# EAGLE board mote (EAGLE 8.4.0)
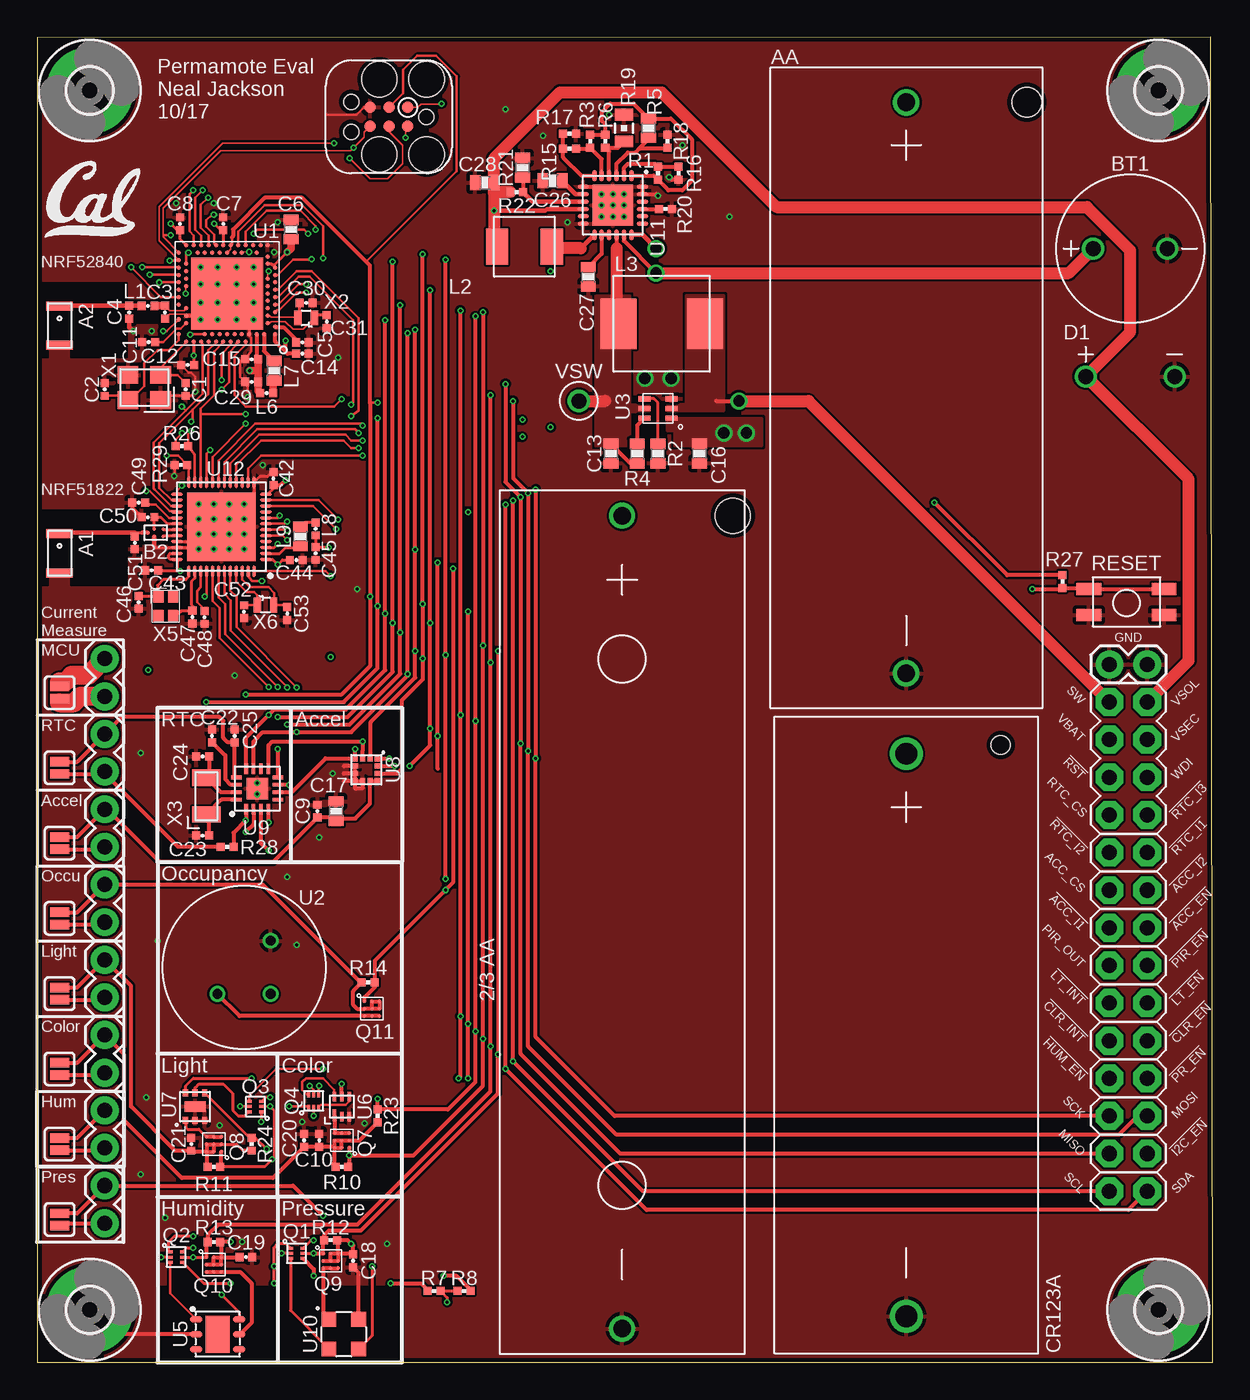
[diagram p0: board, top side]
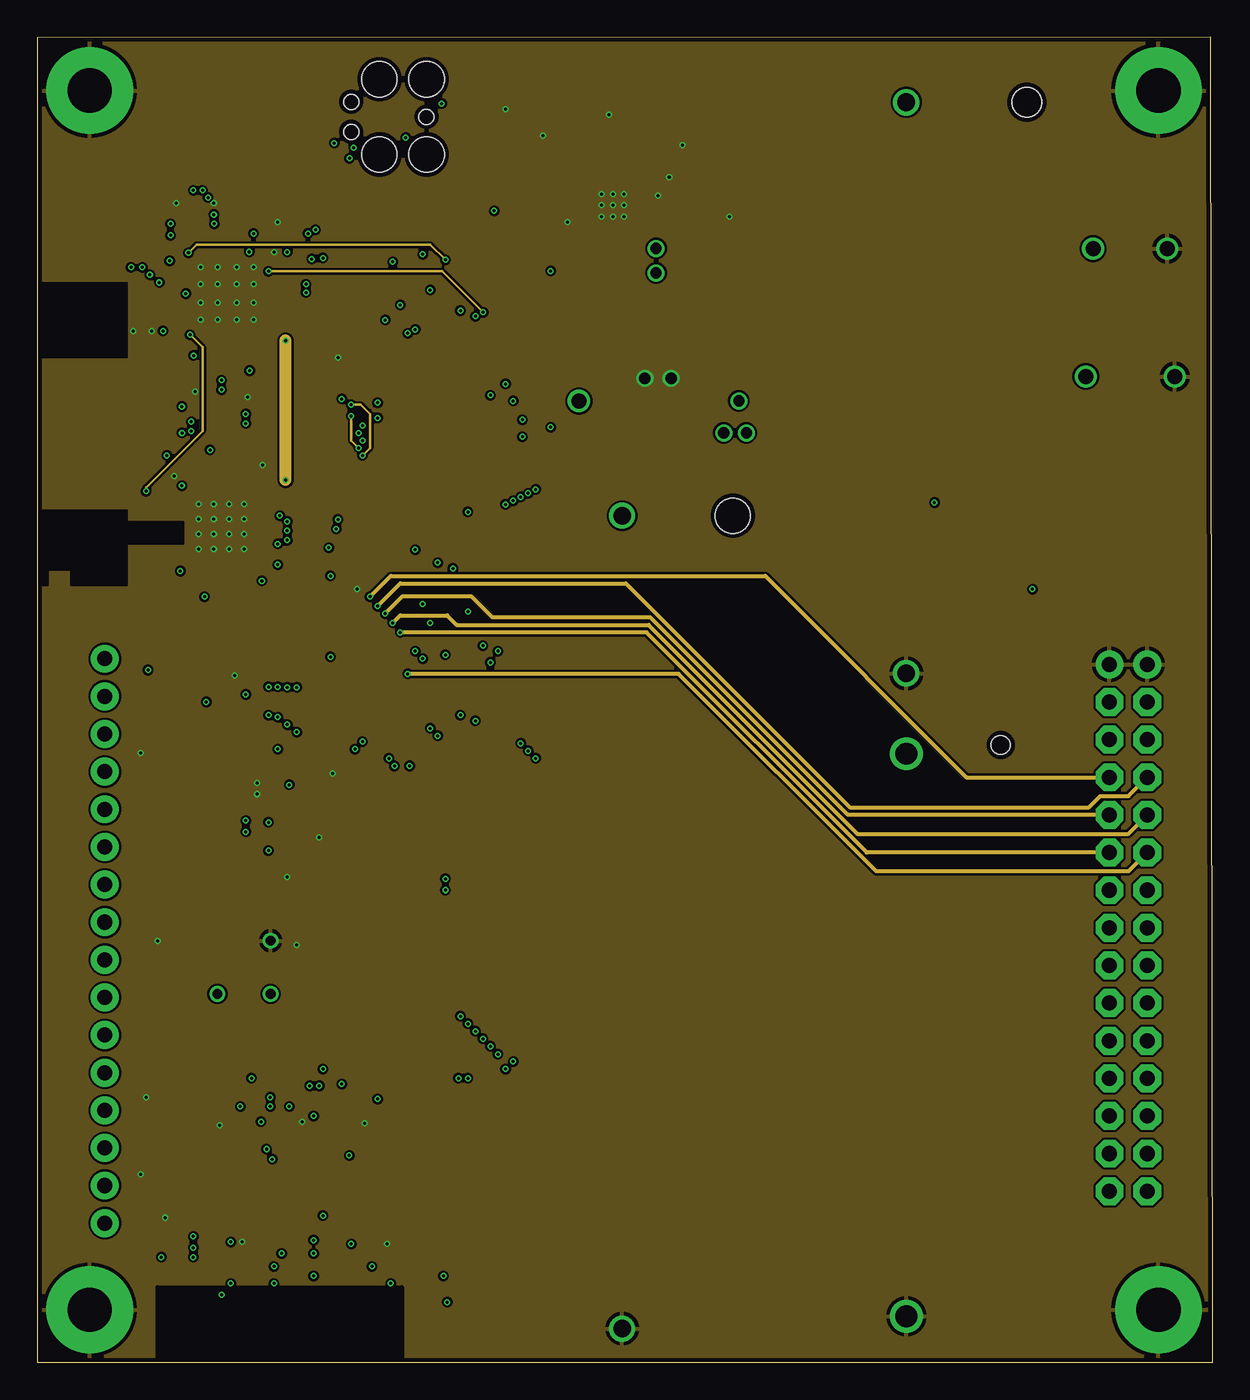
[diagram p1: board, inner layer Route2]
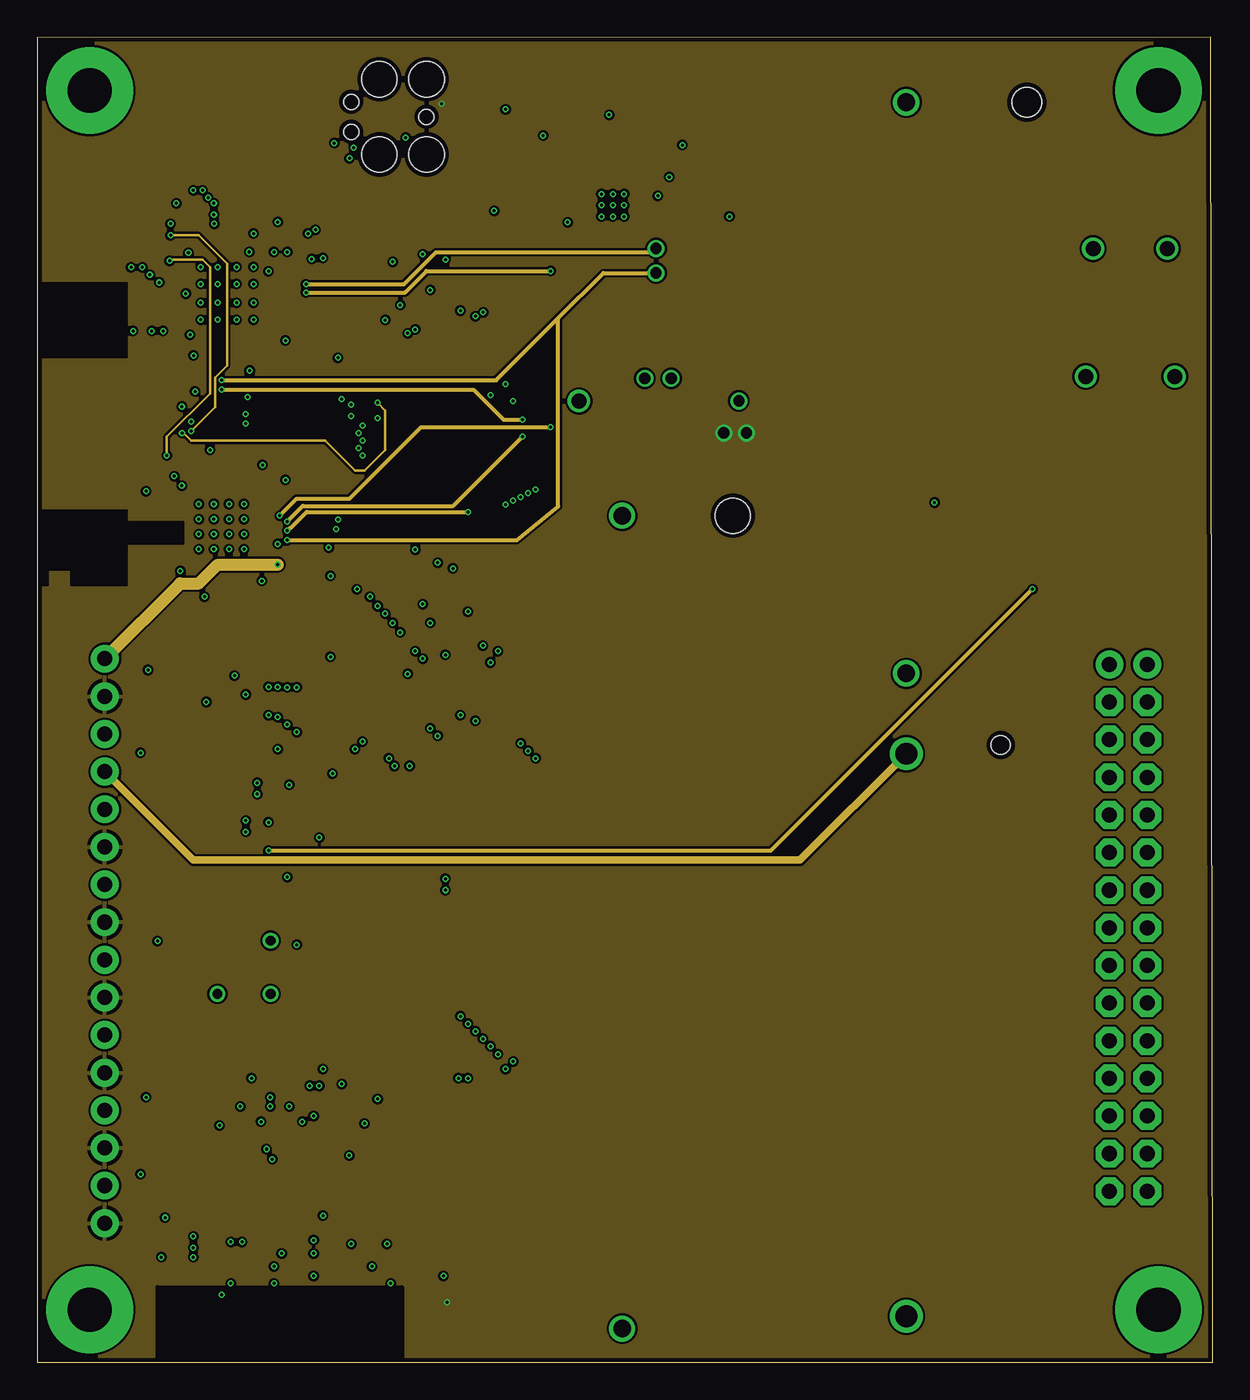
[diagram p2: board, inner layer Route15]
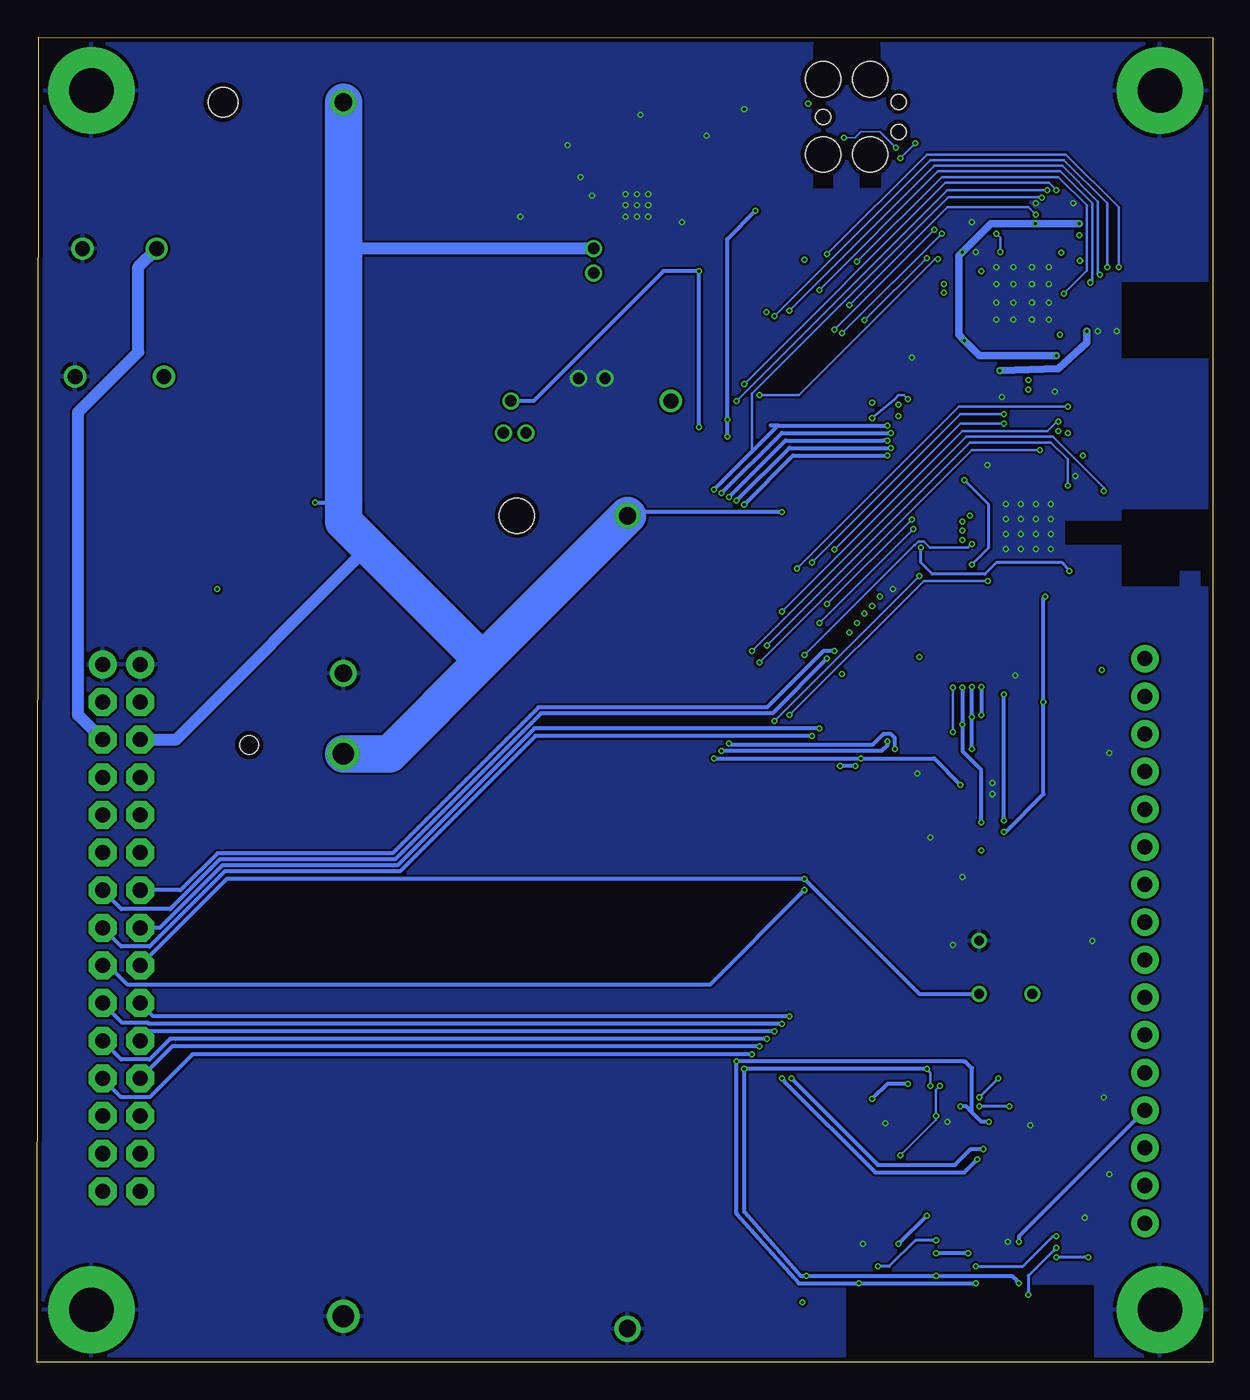
[diagram p3: board, bottom side, seen from below]

Size 79.36 x 89.46 mm. Coordinates in mm from the lower left corner, seen from the top.
Outline: 0,0 79.36,0 79.23,89.46 0,89.41 0,0
Copper layers (1+2*15+16): Top 0.0178mm / dielectric 59mil / Route2 0.0356mm / dielectric 0.1499mm / Route15 0.0356mm / dielectric 0.2007mm / Bottom 0.0178mm
Design rules "quickturn_co_kr_1oz_4lyr *": minimum track width 4mil, minimum drill 8mil, track to track 6mil, track to pad 6mil, pad to pad 6mil, via to via 6mil, smd to smd 6mil, copper to edge 12mil, drill to drill 12mil, minimum pad ring 8mil, minimum via ring 4mil, stop-mask expansion 3mil, vias tented up to drill 50mil, thermal gap 10mil

## Footprints (pad centres in the part's own frame; a part is rotated, then mirrored left to right if it is on the bottom)
ANT3216A063R2400A = smd 0.6 x 1.8: S1 -1.325,0; S2 1.325,0
BAL-NRF01D3 = smd 0.22 x 0.22: ANT1 -0.517,-0.25; ANT2 -0.517,0.25; GND 0.083,0.25; SE 0.516,0; VCC 0.083,-0.25
1020 = drill 1: + -2.5,0; - 2.5,0
6S-2-3A = drill 1.19: + 19.27,0; - -19.27,0 | hole 2: 19.27,-8.13
BHAA-3 = drill 1.17: + 27.43,0; - -27.43,0 | hole 2.36: 27.43,-7.47
BH123A = drill 1.47: + 18.985,0; - -18.985,0 | hole 1.27: 19.58,-6.37
0402_CAP = smd 0.536 x 0.546: 1 -0.433,0; 2 0.433,0
0603_CAP = smd 0.7 x 1: 1 -0.65,0; 2 0.65,0
SOLAR_HOLES = drill 1: + -3,0; - 3,0
3,0-PAD = drill 3 pad 5.842: B3,0 0,0
TC2030-IDC = smd 0.787 x 0.787: 1 -1.27,-0.635; 2 -1.27,0.635; 3 0,-0.635; 4 0,0.635; 5 1.27,-0.635; 6 1.27,0.635 | hole 2.375: -2.54,2.54; 0.635,2.54; 0.635,-2.54; -2.54,-2.54 | hole 1.016: -2.54,0; 2.54,1.016; 2.54,-1.016
2X10 = drill 1.016 pad 1.88 octagon: 1 -11.43,-1.27; 2 -11.43,1.27; 3 -8.89,-1.27; 4 -8.89,1.27; 5 -6.35,-1.27; 6 -6.35,1.27; 7 -3.81,-1.27; 8 -3.81,1.27; 9 -1.27,-1.27; 10 -1.27,1.27; 11 1.27,-1.27; 12 1.27,1.27; 13 3.81,-1.27; 14 3.81,1.27; 15 6.35,-1.27; 16 6.35,1.27; 17 8.89,-1.27; 18 8.89,1.27; 19 11.43,-1.27; 20 11.43,1.27
2X4 = drill 1.016 pad 1.88 octagon: 1 -3.81,-1.27; 2 -3.81,1.27; 3 -1.27,-1.27; 4 -1.27,1.27; 5 1.27,-1.27; 6 1.27,1.27; 7 3.81,-1.27; 8 3.81,1.27
1X02 = drill 1.016 pad 1.88: 1 0,0; 2 2.54,0
SJ_2S = smd 0.635 x 1.27: 1 -0.412,0; 2 0.412,0
74437324220 = smd 1.5 x 2.4: P$1 1.85,0; P$2 -1.85,0
IHL-2525CZ = smd 2.413 x 3.429: P$1 -2.921,0; P$2 2.921,0
XDFN-6 = smd 0.35 x 0.2: 1 -0.425,0.35; 2 -0.425,0; 3 -0.425,-0.35; 4 0.425,-0.35; 5 0.425,0; 6 0.425,0.35
DSBGA = smd 0.25 x 0.25: A1 -0.5,0.5; A2 0,0.5; A3 0.5,0.5; B1 -0.5,0; B2 0,0; B3 0.5,0; C1 -0.5,-0.5; C2 0,-0.5; C3 0.5,-0.5
0402_RES = smd 0.536 x 0.546: 1 -0.433,0; 2 0.433,0
0603-RES = smd 0.7 x 1: 1 -0.65,0; 2 0.65,0
0805_RES = smd 0.8 x 1.2: 1 -0.9,0; 2 0.9,0
EVQP2 = smd 1.676 x 0.813: P$1 -2.54,-0.87; P$2 -2.54,0.908; P$3 2.54,-0.87; P$4 2.54,0.908
TESTPOINT_0.040IN = drill 1.016: TESTPOINT 0,0
AQFN73 = smd 0.3 x 0.3: A8 -1.25,3.25; A10 -0.75,3.25; A12 -0.25,3.25; A14 0.25,3.25; A16 0.75,3.25; A18 1.25,3.25; A20 1.75,3.25; A22 2.25,3.25; A23 2.75,3.25; AA24 3.25,-2.25; AB2 -2.75,-2.5; AC5 -2,-2.75; AC9 -1,-2.75; AC11 -0.5,-2.75; AC13 0,-2.75; AC15 0.5,-2.75; AC17 1,-2.75; AC19 1.5,-2.75; AC21 2,-2.75; AC24 3.25,-2.75; AD2 -2.75,-3.25; AD4 -2.25,-3.25; AD6 -1.75,-3.25; AD8 -1.25,-3.25; AD10 -0.75,-3.25; AD12 -0.25,-3.25; AD14 0.25,-3.25; AD16 0.75,-3.25; AD18 1.25,-3.25; AD20 1.75,-3.25; AD22 2.25,-3.25; AD23 2.75,-3.25; B1 -3.25,2.75; B3 -2.5,2.75; B5 -2,2.75; B7 -1.5,2.75; B9 -1,2.75; B11 -0.5,2.75; B13 0,2.75; B15 0.5,2.75; B17 1,2.75; B19 1.5,2.75; B24 3.25,2.75; C1 -3.25,2.25; D2 -2.75,2; D23 2.75,2; E24 3.25,1.75; F2 -2.75,1.5; F23 2.75,1.5; G1 -3.25,1.25; H2 -2.75,1; H23 2.75,1; J1 -3.25,0.75; J24 3.25,0.75; K2 -2.75,0.5; L1 -3.25,0.25; L24 3.25,0.25; M2 -2.75,0; N1 -3.25,-0.25; N24 3.25,-0.25; P2 -2.75,-0.5; P23 2.75,-0.5; R1 -3.25,-0.75; R24 3.25,-0.75; T2 -2.75,-1; T23 2.75,-1; U1 -3.25,-1.25; U24 3.25,-1.25; V23 2.75,-1.5; W1 -3.25,-1.75; W24 3.25,-1.75; Y2 -2.75,-2; Y23 2.75,-2 | smd 4.85 x 4.85: GND 0,0
AMN2 = drill 0.65: GND 1.796,-1.796; OUT -1.796,-1.796; VCC -1.796,1.796
UDFN-6-MAXIM = smd 0.8 x 0.35: 1 -0.915,0.65; 2 -0.915,0; 3 -0.915,-0.65; 4 0.915,-0.65; 5 0.915,0; 6 0.915,0.65
DFN-6/3MM = smd 0.85 x 0.45: 1 -1.45,1; 2 -1.45,0; 3 -1.45,-1; 4 1.45,-1; 5 1.45,0; 6 1.45,1 | smd 1.6 x 2.5: P$1 0,0
ODFN-6-1.5MMX1.6MM = smd 0.8 x 0.25: 1 -0.6,0.5 | smd 0.65 x 0.25: 2 -0.675,0; 3 -0.675,-0.5; 4 0.675,-0.5; 5 0.675,0; 6 0.675,0.5
UDFN-6-EXPOSED = smd 0.48 x 0.36: 1 -0.925,0.65; 2 -0.925,0; 3 -0.925,-0.65; 4 0.925,-0.65; 5 0.925,0; 6 0.925,0.65 | smd 0.71 x 1.4: EP 0,0
LGA-12 = smd 0.375 x 0.35: 1 -0.75,0.75; 2 -0.75,0.25; 3 -0.75,-0.25; 4 -0.75,-0.75; 7 0.75,-0.75; 8 0.75,-0.25; 9 0.75,0.25; 10 0.75,0.75 | smd 0.35 x 0.375: 5 -0.25,-0.75; 6 0.25,-0.75; 11 0.25,0.75; 12 -0.25,0.75
QFN-16-3MM = smd 0.7 x 0.25: 1 -1.4,0.75; 2 -1.4,0.25; 3 -1.4,-0.25; 4 -1.4,-0.75; 9 1.35,-0.75; 10 1.35,-0.25; 11 1.35,0.25; 12 1.35,0.75 | smd 0.25 x 0.7: 5 -0.75,-1.4; 6 -0.25,-1.4; 7 0.25,-1.4; 8 0.75,-1.4; 13 0.75,1.4; 14 0.25,1.4; 15 -0.25,1.4; 16 -0.75,1.4 | smd 1.45 x 1.45: GND 0,0
4-SMD = smd 1 x 1: 1 -1,1; 2 -1,-1; 3 1,-1; 4 1,1
QFN-24-4MM = smd 0.75 x 0.3: 1 -2,1.25; 2 -2,0.75; 3 -2,0.25; 4 -2,-0.25; 5 -2,-0.75; 6 -2,-1.25; 13 2,-1.25; 14 2,-0.75; 15 2,-0.25; 16 2,0.25; 17 2,0.75; 18 2,1.25 | smd 0.3 x 0.75: 7 -1.25,-2; 8 -0.75,-2; 9 -0.25,-2; 10 0.25,-2; 11 0.75,-2; 12 1.25,-2; 19 1.25,2; 20 0.75,2; 21 0.25,2; 22 -0.25,2; 23 -0.75,2; 24 -1.25,2 | smd 2.75 x 2.75: GND_PAD 0,0
QFN-48-6MM = smd 0.8 x 0.203: 1 -3,2.2; 2 -3,1.8; 3 -3,1.4; 4 -3,1; 5 -3,0.6; 6 -3,0.2; 7 -3,-0.2; 8 -3,-0.6; 9 -3,-1; 10 -3,-1.4; 11 -3,-1.8; 12 -3,-2.2; 25 3,-2.2; 26 3,-1.8; 27 3,-1.4; 28 3,-1; 29 3,-0.6; 30 3,-0.2; 31 3,0.2; 32 3,0.6; 33 3,1; 34 3,1.4; 35 3,1.8; 36 3,2.2 | smd 0.203 x 0.8: 13 -2.2,-3; 14 -1.8,-3; 15 -1.4,-3; 16 -1,-3; 17 -0.6,-3; 18 -0.2,-3; 19 0.2,-3; 20 0.6,-3; 21 1,-3; 22 1.4,-3; 23 1.8,-3; 24 2.2,-3; 37 2.2,3; 38 1.8,3; 39 1.4,3; 40 1,3; 41 0.6,3; 42 0.2,3; 43 -0.2,3; 44 -0.6,3; 45 -1,3; 46 -1.4,3; 47 -1.8,3; 48 -2.2,3 | smd 4.6 x 4.6: GND 0,0
TXC-7V = smd 1.4 x 1.2: 1 -1.1,-0.85; 2 1.1,-0.85; 3 1.1,0.85; 4 -1.1,0.85
ABS05 = smd 0.5 x 1: A -0.55,0; B 0.55,0
2-SMD = smd 1.092 x 1.905: 1 -1.245,0; 2 1.245,0
TXC-8Y = smd 0.8 x 0.7: 1 -0.65,-0.5; 2 0.65,-0.5; 3 0.65,0.5; 4 -0.65,0.5

## Placement (x,y rotation side)
A1  ANT3216A063R2400A  [ANT3216A063R2400A]  1.52,54.61 270 top
A2  ANT3216A063R2400A  [ANT3216A063R2400A]  1.52,69.98 270 top
B2  BAL-NRF01D3  [BAL-NRF01D3]  8,56.01 180 top
BT1  LTOHTC1020  [1020]  73.79,75.18 0 top
BT2  BAT_PACK2/3AA  [6S-2-3A]  58.67,65.79 90 top
BT3  BAT_PACKAA  [BHAA-3]  39.5,29.72 90 top
BT4  BAT_PACKCR123A  [BH123A]  58.67,22.1 90 top
C1  12pF  [0402_CAP]  10.03,65.67 90 top
C2  12pF  [0402_CAP]  4.57,65.67 270 top
C3  0.8pF  [0402_CAP]  8.64,70.88 270 top
C4  0.5pF  [0402_CAP]  6.22,70.88 270 top
C5  100nF  [0402_CAP]  17.91,68.85 0 top
C6  4.7uF  [0603_CAP]  17.14,76.47 90 top
C7  100nF  [0402_CAP]  12.57,76.85 90 top
C8  100nF  [0402_CAP]  9.65,76.85 90 top
C9  0.1uF  [0402_CAP]  18.92,37.21 90 top
C10  1.0uF  [0402_CAP]  19.05,14.99 90 top
C11  100pF  [0402_CAP]  7.54,68.86 180 top
C12  100nF  [0402_CAP]  10.16,67.33 180 top
C13  10uF  [0603_CAP]  38.73,61.34 270 top
C14  1.0uF  [0402_CAP]  17.91,68.09 0 top
C15  1.0uF  [0402_CAP]  14.48,67.71 180 top
C16  10uF  [0603_CAP]  44.7,61.34 270 top
C17  10uF  [0603_CAP]  20.19,37.21 90 top
C18  0.1uF  [0402_CAP]  21.34,6.86 270 top
C19  0.1uF  [0402_CAP]  14.1,7.11 0 top
C20  0.1uF  [0402_CAP]  18.03,14.99 90 top
C21  1.0uF  [0402_CAP]  10.41,14.73 90 top
C22  47pF  [0402_CAP]  11.81,42.29 90 top
C23  DNP  [0402_CAP]  11.18,35.56 180 top
C24  DNP  [0402_CAP]  11.18,40.89 180 top
C25  1.0uF  [0402_CAP]  13.34,42.29 90 top
C26  10nF  [0603_CAP]  34.8,79.76 180 top
C27  10uF  [0603_CAP]  37.21,73.28 270 top
C28  10uF  [0603_CAP]  30.23,79.63 180 top
C29  47nF  [0402_CAP]  14.48,66.18 180 top
C30  12pF  [0402_CAP]  18.16,71.52 180 top
C31  12pF  [0402_CAP]  19.56,70.25 90 top
C42  0.1uF  [0402_CAP]  15.96,59.66 90 top
C43  1nF  [0402_CAP]  7.75,53.47 180 top
C44  4.7uF  [0402_CAP]  17.5,54.17 0 top
C45  1uF  [0402_CAP]  18.8,54.61 270 top
C46  12pF  [0402_CAP]  6.86,51.31 270 top
C47  12pF  [0402_CAP]  10.49,50.32 270 top
C48  1nF  [0402_CAP]  11.3,50.29 270 top
C49  47nF  [0402_CAP]  6.86,58.04 180 top
C50  2.2nF  [0402_CAP]  7.49,57.05 180 top
C51  0.8pF  [0402_CAP]  6.6,55.32 270 top
C52  12pF  [0402_CAP]  13.97,50.67 270 top
C53  12pF  [0402_CAP]  16.89,50.55 270 top
D1  SOLARCELL  [SOLAR_HOLES]  73.79,66.55 0 top
H1  MOUNT-PAD-ROUND3.0  [3,0-PAD]  75.69,3.56 0 top
H2  MOUNT-PAD-ROUND3.0  [3,0-PAD]  3.56,85.85 0 top
H3  MOUNT-PAD-ROUND3.0  [3,0-PAD]  75.69,85.85 0 top
H4  MOUNT-PAD-ROUND3.0  [3,0-PAD]  3.56,3.56 0 top
J1  TC2030-JLINK-L  [TC2030-IDC]  23.75,84.07 180 top
J2  M10X2  [2X10]  73.66,22.99 90 top
J3  M04X2  [2X4]  73.66,40.77 90 top
J4  [1X02]  72.39,47.12 0 top
JP1  [SJ_2S]  1.52,35.05 270 top
JP2  [SJ_2S]  1.52,19.81 270 top
JP3  [SJ_2S]  1.52,24.89 270 top
JP4  [SJ_2S]  1.52,9.65 270 top
JP5  [SJ_2S]  1.52,14.73 270 top
JP6  [SJ_2S]  1.52,40.13 270 top
JP7  [SJ_2S]  1.52,45.21 270 top
JP8  [SJ_2S]  1.52,29.97 270 top
JP9  [1X02]  4.57,47.5 270 top
JP10  [1X02]  4.57,42.42 270 top
JP11  [1X02]  4.57,37.34 270 top
JP12  [1X02]  4.57,22.1 270 top
JP13  [1X02]  4.57,27.18 270 top
JP14  [1X02]  4.57,32.26 270 top
JP15  [1X02]  4.57,11.94 270 top
JP16  [1X02]  4.57,17.02 270 top
L1  3.3nH  [0402_CAP]  7.49,71.31 0 top
L2  22uH  [74437324220]  32.89,75.31 0 top
L3  1uH  [IHL-2525CZ]  42.16,70.1 0 top
L6  15nH  [0402_CAP]  15.49,65.42 0 top
L7  10uH  [0603_CAP]  16,66.94 90 top
L8  15nH  [0402_CAP]  18.8,56.26 90 top
L9  10uH  [0603_CAP]  17.78,55.75 270 top
Q1  PMDXB950UPEL  [XDFN-6]  17.53,7.37 0 top
Q2  PMDXB950UPEL  [XDFN-6]  9.4,7.11 0 top
Q3  PMDXB950UPEL  [XDFN-6]  14.73,17.27 180 top
Q4  PMDXB950UPEL  [XDFN-6]  18.67,17.65 90 top
Q7  CSD22206W  [DSBGA]  20.57,14.99 180 top
Q8  CSD22206W  [DSBGA]  11.94,14.73 180 top
Q9  CSD22206W  [DSBGA]  19.81,6.86 0 top
Q10  CSD22206W  [DSBGA]  11.94,6.6 0 top
Q11  CSD22206W  [DSBGA]  22.61,23.88 0 top
R1  5.1MΩ  [0402_RES]  41.91,80.26 270 top
R2  80.6kΩ  [0603-RES]  41.91,61.34 90 top
R3  6.8MΩ  [0402_RES]  37.34,82.42 90 top
R4  33MΩ  [0603-RES]  40.51,61.34 270 top
R5  5.49MΩ  [0603-RES]  41.27,83.31 90 top
R6  4.22MΩ  [0402_RES]  38.35,82.42 90 top
R7  10kΩ  [0402_RES]  26.8,4.83 0 top
R8  10kΩ  [0402_RES]  28.83,4.83 180 top
R10  100MΩ  [0402_RES]  20.57,13.21 180 top
R11  100MΩ  [0402_RES]  11.94,13.21 180 top
R12  100MΩ  [0402_RES]  19.81,8.26 0 top
R13  100MΩ  [0402_RES]  11.94,8.13 0 top
R14  100MΩ  [0402_RES]  22.35,25.65 180 top
R15  115kΩ  [0402_RES]  35.94,81.92 0 top
R16  5.1MΩ  [0402_RES]  43.31,80.26 90 top
R17  3.6MΩ  [0402_RES]  35.94,82.93 180 top
R18  4.53MΩ  [0402_RES]  42.55,82.42 270 top
R19  5.76MΩ  [0805_RES]  39.62,83.31 270 top
R20  150kΩ  [0402_RES]  42.42,77.85 180 top
R21  18MΩ  [0603-RES]  32.77,80.64 270 top
R22  4.7MΩ  [0402_RES]  32.38,78.99 180 top
R23  10kΩ  [0402_RES]  22.99,16.64 270 top
R24  10kΩ  [0402_RES]  14.48,14.73 270 top
R26  150Ω  [0402_RES]  9.78,61.85 0 top
R27  10kΩ  [0402_RES]  69.22,52.7 90 top
R28  10kΩ  [0402_RES]  12.83,34.8 180 top
R29  12kΩ  [0402_RES]  9.72,60.58 180 top
S1  EVQP2  [EVQP2]  73.53,51.31 0 top
TP10  TEST_POINT_0.040IN  [TESTPOINT_0.040IN]  36.58,64.9 180 top
U1  NRF52840  [AQFN73]  12.83,72.15 180 top
U2  EKMB1101111  [AMN2]  13.97,26.67 90 top
U3  MAX17222  [UDFN-6-MAXIM]  41.91,64.39 180 top
U5  SI7021-A20-GM1  [DFN-6/3MM]  12.19,1.91 0 top
U6  ISL29125  [ODFN-6-1.5MMX1.6MM]  20.57,17.27 90 top
U7  MAX44009  [UDFN-6-EXPOSED]  10.67,17.27 90 top
U8  LIS2DW12  [LGA-12]  22.23,40.01 270 top
U9  AB1815-T3  [QFN-16-3MM]  14.86,38.73 90 top
U10  MS5637-02BA03  [4-SMD]  20.7,1.91 0 top
U11  ADP5091  [QFN-24-4MM]  38.86,78.11 270 top
U12  NRF51822QF  [QFN-48-6MM]  12.45,56.41 180 top
U$1  [UCB_CAL_200MIL]  0.51,75.95 0 top
X1  7V-32.000MAHV-T  [TXC-7V]  7.24,65.8 180 top
X2  ABS05-32.768KHZ-9-T  [ABS05]  18.16,70.5 180 top
X3  ABS07-32.768KHZ-7-T  [2-SMD]  11.43,38.23 90 top
X5  16MHz  [TXC-8Y]  8.69,51.03 270 top
X6  ABS05-32.768KHZ-9-T  [ABS05]  15.42,51.13 0 top

## Library data of the parts
A1 A2 = chips; DIGIKEY: 311-1542-1-ND; MANUFACTURER: YAGEO; MPN: ANT3216A063R2400A
B2 = chips; DIGIKEY: 497-13637-1-ND; MANUFACTURER: STMicroelectronics; MOUSER: 511-BAL-NRF01D3; MPN: BAL-NRF01D3
BT1 = batteries
BT2 = batteries; DIGIKEY: 6S-2-3A-ND; MANUFACTURER: MPD; MPN: 6S-2-3A
BT3 = batteries; DIGIKEY: BHAA-3-ND; MANUFACTURER: MPD; MPN: BHAA-3
BT4 = batteries; DIGIKEY: BH123A-ND; MANUFACTURER: MPD; MPN: BH123A
C1 C2 C30 C31 C46 C47 C52 C53 = passives; DIGIKEY: 490-6197-1-ND
C3 C51 = passives; DIGIKEY: 490-6269-1-ND
C4 = passives; DIGIKEY: 490-6264-1-ND
C5 C7-C9 C12 C18-C20 C42 = passives; DIGIKEY: 490-6328-1-ND
C6 C44 = passives; DIGIKEY: 445-5947-1-ND
C10 C14 C15 C21 C25 = passives; DIGIKEY: 490-7195-1-ND
C11 = passives; DIGIKEY: 490-5922-1-ND
C13 C16 C17 C27 C28 = passives; DIGIKEY: 490-3896-2-ND
C22 = passives; DIGIKEY: 490-5942-1-ND
C23 C24 = passives
C26 = passives; DIGIKEY: 490-4516-1-ND
C29 C49 = passives; DIGIKEY: 445-1264-1-ND
C43 C48 = passives; DIGIKEY: 490-1303-1-ND
C45 = passives; DIGIKEY: 1276-1513-1-ND
C50 = passives; DIGIKEY: 490-5419-1-ND
D1 = mote
H1-H4 = holes
J1 = connector
J2-J4 JP9-JP16 = SparkFun-Connectors
JP1-JP8 = SparkFun-Passives
L1 = passives; DIGIKEY: 535-10426-1-ND
L2 = passives; DIGIKEY: 732-3340-1-ND
L3 = passives; DIGIKEY: 541-2562-1-ND
L6 L8 = passives; DIGIKEY: 587-1521-1-ND
L7 L9 = passives; DIGIKEY: 490-4025-1-ND
Q1-Q4 = fets; DIGIKEY: 1727-2601-1-ND; MANUFACTURER: NEXPERIA; MPN: PMDXB950UPELZ
Q7-Q11 = fets; DIGIKEY: 296-47005-1-ND; MANUFACTURER: TEXAS INSTRUMENTS; MPN: CSD22206WT
R1 R16 = passives; DIGIKEY: YAG3306CT-ND
R2 = passives; DIGIKEY: 311-80.6KHRCT-ND
R3 = passives; DIGIKEY: YAG3310CT-ND
R4 = passives; DIGIKEY: HMC0603JT33M0CT-ND
R5 = passives; DIGIKEY: 541-5.49MHCT-ND
R6 = passives; DIGIKEY: 541-4.22MLCT-ND
R7 R8 R23 R24 R27 R28 = passives; DIGIKEY: 311-10KJRCT-ND
R10-R14 = passives; DIGIKEY: 541-100MAHCT-ND
R15 = passives; DIGIKEY: YAG2956CT-ND
R17 = passives; DIGIKEY: 311-3.60MLRCT-ND
R18 = passives; DIGIKEY: 541-4.53MLCT-ND
R19 = passives; DIGIKEY: 311-5.76MCRCT-ND
R20 = passives; DIGIKEY: 311-1.00MLRCT-ND
R21 = passives; DIGIKEY: P18MGCT-ND
R22 = passives; DIGIKEY: YAG3304CT-ND
R26 R29 = passives; DIGIKEY: RHM12.0KCDCT-ND
S1 = switches; DIGIKEY: P11084SCT-ND
TP10 = headers; DIGIKEY: 5001K-ND
U1 = chips; MANUFACTURER: NORIDIC SEMICONDUCTOR; MPN: NRF52840
U2 = chips; DIGIKEY: 255-3065-ND; MANUFACTURER: PANASONIC; MPN: EKMB1101111
U3 = chips; DIGIKEY: MAX17222ELT+TCT-ND; MANUFACTURER: MAXIM INTEGRATED; MPN: MAX17222ELT+T
U5 = chips; DIGIKEY: 336-3141-ND; MOUSER: 634-SI7021-A20-GM1
U6 = chips; DIGIKEY: ISL29125IROZ-T7ACT-ND; MANUFACTURER: INTERSIL; MPN: ISL29125IROZ-T7A
U7 = chips; DIGIKEY: MAX44009EDT+TCT-ND; MANUFACTURER: MAXIM; MPN: MAX44009EDT+T
U8 = chips; MANUFACTURER: STMicroelectronics; MOUSER: 511-LIS2DW12TR; MPN: LIS2DW12TR
U9 = chips; DIGIKEY: 535-11936-2-ND; MANUFACTURER: Abracon; MPN: AB1815-T3
U10 = chips; DIGIKEY: 223-1199-1-ND; MANUFACTURER: TE CONNECTIVITY; MPN: MS563702BA03-50
U11 = chips; DIGIKEY: ADP5091ACPZ-1-R7CT-ND; MANUFACTURER: ANALOG DEVICES; MPN: ADP5091ACPZ-1-R7
U12 = chips; DIGIKEY: 1490-1049-1-ND; MANUFACTURER: Nordic Semi; MOUSER: 949-NRF51822-QFAC-R7; MPN: NRF51822-QFAC-R7
U$1 = logos
X1 = crystals; DIGIKEY: 887-2568-1-ND; MANUFACTURER: TXC CORPORATION; MPN: 7M-32.000MAHV-T
X2 X6 = crystals; DIGIKEY: 535-11897-1-ND; MANUFACTURER: Abracon; MPN: ABS05-32.768KHZ-9-T
X3 = crystals; DIGIKEY: 535-9543-1-ND; MANUFACTURER: ABRACON; MPN: ABS07-32.768KHZ-7-T
X5 = crystals; DIGIKEY: 887-2003-1-ND

## Nets
!ACC_EN: J2.15 U1.A14 U12.22
!CLR_EN: J2.9 Q4.2 Q4.5 Q7.A1 R10.1 U1.T2 U12.25
!CLR_INT: J2.10 R23.1 U1.W24 U6.5 U12.48
!HUM_EN: J2.8 Q2.2 Q2.5 Q10.A1 R13.1 U1.U1 U12.21
!I2C_EN: J2.3
!LT_EN: J2.11 Q3.2 Q3.5 Q8.A1 R11.1 U1.A16 U12.26
!LT_INT: J2.12 R24.1 U1.U24 U7.4 U12.47
!PIR_EN: J2.13 Q11.A1 R14.1 U1.A20 U12.27
!PR_EN: J2.7 Q1.2 Q1.5 Q9.A1 R12.1 U1.B19 U12.28
!RST: J1.3 J3.4 R26.1 R28.1 U1.AC13 U1.AD12 U9.1
!RTC_EXTR: R27.1 S1.P$2 S1.P$4 U9.3
!RTC_IRQ1: J2.19 U1.AC9 U9.11 U12.44
!RTC_IRQ2: J2.20 U1.AD16 U9.4 U12.43
!RTC_IRQ3: J3.1 U1.P23 U9.8 U12.42
ACC_CS: J2.18 U1.AD8 U8.2 U12.20
ACC_INT1: J2.16 U1.R24 U8.12 U12.10
ACC_INT2: J2.17 U1.L24 U8.11 U12.11
AVDD1: C43.1 C45.1 L8.1 U12.35 U12.36
DCC1: L9.2 U12.2
GND: A1.S2 A2.S2 B2.GND BT1.- BT2.- BT3.- BT4.- C1.1 C2.1 C3.2 C4.2 C5.2 C6.2 C7.2 C8.2 C9.2 C10.2 C11.2 C12.2 C13.2 C14.2 C15.2 C16.2 C17.2 C18.2 C19.2 C20.2 C21.2 C22.2 C23.2 C24.2 C25.2 C26.2 C27.2 C28.2 C29.2 C30.1 C31.1 C42.2 C43.2 C44.2 C45.2 C46.2 C47.2 C48.2 C49.2 C50.2 C51.2 C52.2 C53.2 D1.- H1.B3,0 H2.B3,0 H3.B3,0 H4.B3,0 J1.5 J4.1 J4.2 R2.1 R16.1 R17.1 R18.1 R19.1 R20.1 R21.1 R29.2 S1.P$1 S1.P$3 U1.AD2 U1.B7 U1.F23 U1.GND U2.GND U3.3 U5.2 U6.3 U7.2 U7.3 U7.EP U8.5 U8.6 U8.7 U8.8 U9.GND U10.4 U11.7 U11.12 U11.23 U11.24 U11.GND_PAD U12.13 U12.33 U12.34 U12.GND X1.2 X1.4
MISO: J2.4 U1.AD22 U8.4 U9.6 U12.17
MOSI: J2.5 U1.AD20 U8.3 U9.9 U12.18
N$1: R1.1 R16.2 U11.2
N$2: C5.1 U1.C1
N$3: C15.1 C29.1 L6.1 U1.B5 U1.E24
N$4: C11.1 U1.D23
N$5: C3.1 L1.2 U1.H23
N$6: A2.S1 C4.1 L1.1
N$8: C2.2 U1.B24 X1.3
N$9: C1.2 U1.A23 X1.1
N$10: R1.2 R3.2 R5.2 R6.2 U11.1
N$11: R3.1 R15.2 U11.5
N$12: R2.2 U3.4
N$13: R15.1 R17.2 U11.6
N$14: R4.1 U3.6
N$15: C9.1 C17.1 JP1.1 JP11.1 U8.9 U8.10
N$16: R5.1 R18.2 U11.3
N$17: R6.1 R19.2 U11.4
N$18: R20.2 U11.21
N$19: C18.1 JP4.1 JP15.1 Q9.A2 Q9.A3 Q9.B1 Q9.B2 Q9.B3 R12.2
N$20: Q8.C1 Q8.C2 Q8.C3 U7.1
N$21: Q9.C1 Q9.C2 Q9.C3 U10.1
N$22: Q10.C1 Q10.C2 Q10.C3 U5.5
N$23: Q11.C1 Q11.C2 Q11.C3 U2.VCC
N$24: JP8.1 JP14.1 Q11.A2 Q11.A3 Q11.B1 Q11.B2 Q11.B3 R14.2
N$25: C22.1 U9.14
N$26: C23.1 U9.16 X3.1
N$27: C24.1 U9.15 X3.2
N$30: C26.1 U11.8
N$31: Q7.C1 Q7.C2 Q7.C3 U6.1
N$32: R21.2 R22.1 U11.9
N$33: C10.1 C20.1 JP2.1 JP12.1 Q7.A2 Q7.A3 Q7.B1 Q7.B2 Q7.B3 R10.2 R23.2
N$34: Q1.6 U10.3
N$36: C19.1 JP5.1 JP16.1 Q10.A2 Q10.A3 Q10.B1 Q10.B2 Q10.B3 R13.2
N$37: C21.1 JP3.1 JP13.1 Q8.A2 Q8.A3 Q8.B1 Q8.B2 Q8.B3 R11.2 R24.2
N$41: Q1.3 U10.2
N$42: C25.1 JP6.1 JP10.1 U9.13
N$44: L7.2 U1.B3
N$45: L2.P$1 U11.13
N$47: C27.1 U11.14 U11.15
N$48: Q2.3 U5.1
N$49: L6.2 L7.1
N$50: Q2.6 U5.6
N$51: Q3.3 U7.6
N$52: Q3.6 U7.5
N$54: Q4.3 U6.4
N$55: Q4.6 U6.6
N$60: B2.ANT1 U12.31
N$61: B2.ANT2 U12.32
N$62: A1.S1 B2.SE C51.1
N$63: L8.2 L9.1
N$64: C46.1 U12.37 X5.1
N$65: C47.1 U12.38 X5.3
N$66: C48.1 U12.39
N$67: C49.1 U12.29
NRF_A2: C53.1 U12.46 X6.B
NRF_A3: C52.1 U12.45 X6.A
PIR_OUT: J2.14 U1.Y23 U2.OUT U12.3
RTC_CS: J3.2 U1.AD10 U9.12 U12.41
SCK: J2.6 U1.AD18 U8.1 U9.7 U12.19
SCL: J2.2 Q1.1 Q2.1 Q3.1 Q4.1 R7.1 U1.N1 U12.16
SDA: J2.1 Q1.4 Q2.4 Q3.4 Q4.4 R8.1 U1.L1 U12.14
SW: J3.8 L3.P$2 U1.G1 U3.2 U12.8
SWDCLK: J1.4 R29.1 U1.AA24 U12.24
SWDIO: J1.2 J1.6 R26.2 U1.AC24 U12.23
VBAT: BT2.+ BT3.+ BT4.+ J3.6 JP6.2 JP10.2 R27.2 R28.2 U1.J1 U11.18 U12.6
VCC: C16.1 J1.1 JP1.2 JP2.2 JP3.2 JP4.2 JP5.2 JP7.2 JP8.2 JP9.2 JP11.2 JP12.2 JP13.2 JP14.2 JP15.2 JP16.2 R7.2 R8.2 U3.1
VCC_JUMP: C6.1 C7.1 C8.1 C12.1 C14.1 C42.1 C44.1 JP7.1 JP9.1 U1.A22 U1.AD14 U1.AD23 U1.B1 U1.W1 U1.Y2 U12.1 U12.12
VDD_PA1: B2.VCC C50.1 U12.30
VSEC: BT1.+ J3.5 U1.A12 U11.17 U12.5
VSOL: C28.1 D1.+ J3.7 L2.P$2 R22.2 U1.A10 U11.10 U12.7
VSW: C13.1 L3.P$1 R4.2 TP10.TESTPOINT U3.5 U11.16
WDI: J3.3 U1.A8 U9.2 U12.40
XL1: C31.2 U1.D2 X2.A
XL2: C30.2 U1.F2 X2.B

## Tracks (layer width: path | path; a pad name or v marks a point on that pad's centre or on a via)
!ACC_EN  (via drill 0.2)
  Top 0.152: U12.22 11.05,64.01 | 11.05,64.01 11.05,64.39 11.94,65.28 11.94,68.23 12.58,68.87 U1.A14 | 11.05,64.01 v14.1,64.01
  Top 0.254: 27.05,40.08 v27.05,42.29 v27.05,53.98
  Bottom 0.152: v14.1,64.01 17.02,64.01 v27.05,53.98
  Bottom 0.254: v27.05,42.29 45.72,42.29 54.86,33.15 66.67,33.15 71.75,28.07 73.66,28.07 J2.15
!CLR_EN  (via drill 0.2)
  Top 0.102: U1.T2 15.58,73.62 v15.62,73.65
  Top 0.152: v9.78,59.18 9.45,58.85 U12.25 | v30.11,70.88 30.1,70.87 | Q4.5 18.67,18.41 v18.41,18.67 | Q4.2 v18.67,16.64
  Top 0.254: 30.1,70.87 v30.1,48.39 v30.1,21.84 30.1,18.67 25.4,13.97 v21.07,13.97 | Q7.A1 v21.07,13.97 | v21.07,13.97 21.07,13.28 R10.1
  Route2 0.152: 27.35,73.65 27.33,73.66 | 27.35,73.65 v30.11,70.88 | v15.62,73.65 27.35,73.65
  Bottom 0.152: v9.78,59.18 9.78,60.96 10.92,62.1 16.38,62.1 v30.1,48.39 | v18.41,18.67 18.67,18.41 v18.67,16.64 18.67,16.38 v21.07,13.97
  Bottom 0.254: v30.1,21.84 70.36,21.84 71.75,20.45 73.66,20.45 J2.9
!CLR_INT  (via drill 0.2)
  Top 0.152: U1.W24 9.55,73.93 9.53,73.91 v7.11,73.91 | v19.81,53.09 19.49,53.41 U12.48
  Top 0.254: U6.5 v20.57,18.8 | v22.99,17.78 R23.1 27.74,17.07 29.59,18.92 v29.59,22.35 v29.59,43.31 v29.59,70.61
  Bottom 0.152: v19.81,53.09 v29.59,43.31 | v7.11,73.91 7.11,78.23 10.03,81.15 19.05,81.15 v29.59,70.61
  Bottom 0.254: v20.57,18.8 21.97,18.8 v22.99,17.78 | v29.59,22.35 71.75,22.35 J2.10
!HUM_EN  (via drill 0.2)
  Top 0.152: 11.43,8.2 R13.1 | U12.21 11.45,61.36 v11.68,61.59 | U1.U1 16.25,73.4 17.27,74.42 18.49,74.42 v18.54,74.47
  Top 0.203: Q2.5 v10.54,7.11 11.44,7.11 | Q2.2 v8.38,7.11
  Top 0.254: Q10.A1 11.44,7.11 11.44,8.06 R13.1 11.56,8.18 11.56,8.64 12.22,9.3 21.61,9.3 30.61,18.29 v30.61,21.34 v30.61,47.24 v30.61,65.28
  Bottom 0.152: v11.68,61.59 16.26,61.59 v30.61,47.24 | v18.54,74.47 18.75,74.47 27.94,65.28 v30.61,65.28
  Bottom 0.203: v8.38,7.11 v10.54,7.11
  Bottom 0.254: v30.61,21.34 70.23,21.34 J2.8
!LT_EN  (via drill 0.2)
  Top 0.152: U12.26 9.08,58.21 8.26,59.03 8.26,62.05 8.76,62.56 | 10.5,64.3 8.76,62.56 | 10.5,64.3 11.56,65.36 11.56,68.33 12.08,68.85 U1.A16 | 10.5,64.3 10.5,63.59 v10.41,63.5 | 8.79,62.59 8.76,62.56 | 8.76,62.56 | Q3.5 v13.72,17.27 | Q3.2 v15.75,17.27
  Top 0.203: v15.75,17.27 16,17.02 16,13.84 v15.88,13.72 15.37,13.21 12.51,13.21 12.44,13.28
  Top 0.254: Q8.A1 12.44,13.28 R11.1 | v29.08,50.67 v29.08,22.86 v29.08,19.18
  Bottom 0.152: v10.41,63.5 10.49,63.42 10.59,63.42 11.15,62.87 16.89,62.87 v29.08,50.67
  Bottom 0.203: v13.72,17.27 v15.75,17.27
  Bottom 0.254: v29.08,22.86 71.81,22.86 71.89,22.94 73.61,22.94 J2.11 | v29.08,19.18 28.93,19.02 28.93,18.98 22.78,12.83 16.76,12.83 v15.88,13.72
!LT_INT  (via drill 0.2)
  Top 0.152: U1.U24 9.56,73.42 9.54,73.41 v7.62,73.41 | U12.47 14.32,53.34 14.32,52.97 14.53,52.76 v15.18,52.76
  Top 0.203: U7.4 14.35,15.16 R24.1 14.73,15.16 v15.49,14.4
  Top 0.254: v28.45,19.18 28.57,19.3 v28.57,23.37 v28.57,43.69 v28.57,70.99
  Bottom 0.152: v15.18,52.76 19.51,52.76 v28.57,43.69 | v7.62,73.41 7.75,73.53 7.75,78.36 10.16,80.77 18.8,80.77 v28.57,70.99
  Bottom 0.254: v28.57,23.37 71.5,23.37 J2.12 | v28.45,19.18 22.61,13.34 17.4,13.34 16.33,14.4 v15.49,14.4
!PIR_EN  (via drill 0.2)
  Top 0.152: U1.A20 11.08,68.82 11.18,68.72 11.18,65.41 10.03,64.26 | v9.78,64.52 10.03,64.26 | 10.03,64.26 7.87,62.1 7.87,58.98 7.95,58.9 9.04,57.81 U12.27
  Top 0.254: Q11.A1 22.11,24.65 22.79,25.32 R14.1 | R14.1 22.86,25.65 | v28.07,53.59 28.07,32.38 v27.56,31.88 22.79,27.1 R14.1
  Bottom 0.152: v9.78,64.52 17.14,64.52 v28.07,53.59
  Bottom 0.254: J2.13 74.55,26.8 73.28,25.53 33.91,25.53 v27.56,31.88
!PR_EN  (via drill 0.2)
  Top 0.152: U12.28 9.38,57.48 8.94,57.48 7.62,58.8 v7.37,58.8 | U1.B19 10.35,69.4 v10.32,69.37
  Top 0.203: Q1.5 v18.67,7.37 | Q1.2 v16.51,7.37
  Top 0.254: v31.11,48.01 v31.11,20.8 31.11,18.16 21.84,8.89 19.68,8.89 19.38,8.58 R12.1 19.31,8.19 Q9.A1 v18.67,7.37
  Route2 0.152: v10.32,69.37 11.18,68.52 11.18,62.87 7.37,59.05 v7.37,58.8
  Bottom 0.152: v31.11,48.01 16.64,62.48 10.79,62.48 7.37,59.05 v7.37,58.8
  Bottom 0.254: v31.11,20.8 68.86,20.8 71.75,17.91 73.66,17.91 J2.7 | v16.51,7.37 v18.67,7.37
!RST  (via drill 0.2)
  Top 0.102: U1.AC13 13.08,75.15 U1.AD12
  Top 0.152: R26.1 9.35,62.3 v9.78,62.74 | U1.AD12 13.16,75.48 13.16,75.95 | v22.99,64.77 22.48,64.77 | J1.3 24.72,85.68 24.72,87.26 25.64,88.18 26.94,88.18 28.32,86.8 28.32,80.39 22.23,74.3
  Top 0.254: v14.1,45.09 20.57,45.09 22.48,46.99 v22.48,51.69 22.48,64.77 22.48,74.04 22.23,74.3 17.91,78.61 15.37,78.61 13.23,76.47 13.23,76.02 13.16,75.95 | R28.1 13.26,35.74 v14.1,36.58 v14.11,36.59 U9.1
  Route2 0.254: v22.48,51.69 23.88,53.09 49.15,53.09 62.74,39.5 J3.4
  Route15 0.152: v9.78,62.74 9.91,62.74 10.41,62.23 19.43,62.23 21.46,60.2 22.1,60.2 23.5,61.59 23.5,64.26 v22.99,64.77
  Bottom 0.254: v14.1,36.58 v14.1,45.09
!RTC_EXTR  (via drill 0.2)
  Top 0.254: S1.P$4 S1.P$2 70.94,52.27 R27.1 69.14,52.2 v67.18,52.2 | U9.3 15.11,35.06 v15.62,34.54
  Route15 0.254: v67.18,52.2 49.53,34.54 v15.62,34.54
!RTC_IRQ1  (via drill 0.2)
  Top 0.102: U1.AC9 13.88,74.96 v14.32,74.96
  Top 0.152: U12.44 13.05,52.1 13.46,51.69 13.46,49.63 v17.53,45.57 | v14.61,76.2 14.86,76.45 18.03,76.45 v18.29,76.2
  Top 0.254: U9.11 14.61,41.91 15.24,42.55 v17.53,42.55 21.21,42.55 25.02,46.35 v25.02,46.48 v25.02,69.47
  Route2 0.254: J2.19 73.66,33.15 56.64,33.15 43.31,46.48 v25.02,46.48
  Bottom 0.152: v17.53,45.57 v17.53,42.55 | v18.29,76.2 v25.02,69.47 | v14.32,74.96 14.32,75.92 v14.61,76.2
!RTC_IRQ2  (via drill 0.2)
  Top 0.152: U12.43 12.65,51.87 13.08,51.44 13.08,49.4 16.89,45.59 v16.89,45.57 | U1.AD16 11.96,75.52 11.96,76.12 11.43,76.65 11.43,77.09 11.81,77.47 v11.94,77.47
  Top 0.254: U9.4 v15.61,36.46 v15.62,36.45 | v16.89,43.05 21.08,43.05 24.51,46.48 v24.51,49.28 v24.51,71.37
  Route2 0.254: J2.20 56.01,34.42 41.15,49.28 v24.51,49.28
  Bottom 0.152: v11.94,77.47 12.45,77.98 17.91,77.98 v24.51,71.37
  Bottom 0.254: v15.62,36.45 15.62,40.01 16.89,41.27 v16.89,43.05 v16.89,45.57
!RTC_IRQ3  (via drill 0.2)
  Top 0.102: U1.P23 10.05,72.62 v10.05,72.14
  Top 0.152: U12.42 12.25,51.63 12.7,51.18 12.7,49.15 v16.26,45.59
  Top 0.254: U9.8 16.26,41.27 v16.26,41.4 | v24,74.3 v24,49.91 24,46.61 20.95,43.56 v16.26,43.56
  Route2 0.254: v24,49.91 24.51,50.42 27.69,50.42 28.32,49.78 41.27,49.78 55.37,35.69 73.66,35.69 J3.1
  Bottom 0.152: v24,74.3 18.29,80.01 10.41,80.01 8.51,78.11 8.51,73.68 v10.05,72.14
  Bottom 0.254: v16.26,41.4 v16.26,43.56 v16.26,45.59
ACC_CS  (via drill 0.2)
  Top 0.152: U12.20 11.85,61.12 v14.1,63.37 | v18.8,76.45 18.8,76.71 17.78,77.72 15.49,77.72 14.08,76.31 U1.AD8
  Top 0.254: U8.2 22.52,40.8 22.52,43.22 25.53,46.23 v25.53,48.01 v25.53,54.86 v25.53,69.72
  Bottom 0.152: v14.1,63.37 17.02,63.37 v25.53,54.86 | v18.8,76.45 v25.53,69.72
  Bottom 0.254: v25.53,48.01 26.29,48.01 30.07,44.22 45.51,44.22 55.37,34.37 67.18,34.37 69.67,31.88 J2.18
ACC_INT1  (via drill 0.2)
  Top 0.152: 9.56,72.91 U1.R24 8.51,72.9 v8.26,72.9 | U12.10 18.65,57.81 v20.19,56.26
  Top 0.254: v26.54,72.39 v26.54,49.91 v26.54,42.8 26.54,41.66 v25.15,40.26 | U8.12 v24.13,40.26
  Bottom 0.152: v20.19,56.26 v26.54,49.91 | v8.26,72.9 8.13,73.03 8.13,78.23 10.29,80.39 18.54,80.39 v26.54,72.39
  Bottom 0.254: v24.13,40.26 v25.15,40.26 | J2.16 71.06,29.34 66.84,33.55 55.03,33.55 45.79,42.8 v26.54,42.8
ACC_INT2  (via drill 0.2)
  Top 0.152: U1.L24 8.36,71.9 v6.35,73.91 | U12.11 19.01,58.21 v20.32,56.9
  Top 0.254: U8.11 23.75,39.76 23.75,39.75 24.3,39.75 24.64,40.08 24.64,44.7 26.04,46.1 v26.04,47.5 v26.04,51.18 v26.04,74.8
  Bottom 0.152: v20.32,56.9 v26.04,51.18 | v6.35,73.91 6.35,77.98 9.91,81.53 19.3,81.53 v26.04,74.8
  Bottom 0.254: v26.04,47.5 29.72,43.81 45.34,43.81 55.2,33.96 67.01,33.96 70.36,30.61 73.66,30.61 J2.17
AVDD1  (via drill 0.2)
  Top 0.203: U12.35 8.96,54.61 8.89,54.51 8.89,54.3 8.99,54.21 U12.36 9.45,53.65 v9.68,53.42 8.23,53.42 C43.1 | L8.1 C45.1 19.63,55.04 v19.68,54.99
  Bottom 0.203: v9.68,53.42 10.16,53.98 14.61,53.98 15.37,53.21 18.92,53.21 19.68,53.98 v19.68,54.99
DCC1
  Top 0.203: U12.2 16.38,54.61 16.76,54.99 17.41,54.99 L9.2
GND  (via drill 0.2, 0.76)
  Top 0.102: 9.43,70.75 | 9.43,70.75 9.97,70.75 U1.F23 | C3.2 8.94,70.75 9.43,70.75
  Top 0.152: U1.B7 14.33,69.31 14.46,69.19 14.46,68.25 C15.2 13.72,67.63 13.72,66.51 C29.2 14.22,66 14.22,65.53 | 11.05,70.88 v11.05,71.52 11.68,72.15 U1.GND | C12.2 10.23,66.82 10.39,66.82 10.67,66.55 v10.67,65.53 10.38,65.24 C1.1 8.88,65.24 | 9.28,60.7 R29.2 9.28,59.95 v9.27,59.82 | J1.5 22.09,84.71 21.58,84.2 19.56,84.2
  Top 0.203: U1.B7 14.33,70.65 U1.GND | C42.2 15.93,60.17 15.54,59.79 15.03,59.79 U12.13 14.65,58.74 v13.97,57.94 | U12.33 10.28,55.41 v10.92,54.89 10.68,55.01 U12.34 9.43,54.99 8,54.99 7.92,55.07 | v13.97,55.91 v13.97,54.89 | U12.GND v12.95,55.91 | 5.21,1.91 H4.B3,0
  Top 0.254: R16.1 42.85,79.83 v42.67,80.01 | U11.24 U11.23 41.8,78.86 v41.91,78.74 | U11.7 37.61,79.36 v38.1,78.87 | U5.2 5.21,1.91 | U10.4 21.7,6.06 C18.2 | U8.7 U8.8 21.98,38.75 21.56,38.75 21.54,38.73 21.48,38.73 U8.7 | U8.7 U8.6 | U8.6 20.7,39.76 20.7,39.75 | U8.7 21.46,39.24 20.7,39.24 | 20.7,40.26 U8.5 U8.6 | C49.2 6.42,57.68 C50.2
  Top 0.305: B2.GND 7.92,55.07 | U1.F23 10.61,70.65 10.84,70.88 11.05,70.88 | C4.2 6.22,69.85 6.24,69.85 v6.48,69.61
  other vias: 41.02,66.42 42.8,66.42 11.94,55.91 11.94,56.92 11.94,57.94 11.94,54.89 10.92,55.91 10.92,56.92 10.92,57.94 12.95,57.94 12.95,56.92 12.95,54.89 13.97,56.92 15.21,60.58 14.61,73.93 14.61,72.79 14.61,71.52 14.61,70.37 7.75,69.61 13.46,73.93 13.46,72.79 13.46,71.52 13.46,70.37 12.19,73.93 12.19,72.79 12.19,71.52 12.19,70.37 11.05,73.93 11.05,72.79 11.05,70.37 38.86,78.11 39.62,78.87 39.62,78.11 39.62,77.34 38.86,78.87 38.86,77.34 38.1,78.11 38.1,77.34 35.81,76.96 43.56,82.17 12.32,16 13.84,8.13 23.62,8 22.1,16.13 17.91,16.26 6.99,41.15 21.59,52.2 13.34,46.35 8.13,28.45 8.64,9.78 17.53,28.19 6.99,12.7 11.94,78.23 9.4,78.23 16,74.95 16.26,76.98 14.86,39.12 14.86,38.35 16.89,32.77 19.05,35.43 34.16,82.8 31.62,84.58 46.74,77.34 14.22,65.15 20.32,67.82 19.94,39.75 7.37,17.91 38.61,84.2
  pour Top (rank 2): 0,89.41 79.25,89.41 79.25,0 0,0
  pour Bottom (rank 2): 0,89.41 79.25,89.41 79.25,0 0,0
  pour Top (rank 2, no thermals): 0.76,68.83 2.29,68.83 2.29,67.56 0.76,67.56
  pour Top (rank 2, no thermals): 0.76,52.2 0.76,53.47 2.29,53.47 2.29,52.2
  pour Route2 (rank 2): 0,89.41 0,0 79.25,0 79.25,89.41
MISO  (via drill 0.2)
  Top 0.152: U1.AD22 10.58,76.05 10.29,76.34 10.29,78.87 v10.54,79.12 | U12.17 13.05,60.67 14.99,62.61 20.83,62.61 21.21,62.23 v21.97,62.23
  Top 0.254: U9.6 16.28,38.51 17.22,38.51 19.48,40.77 21.46,40.77 | 21.46,40.77 v21.46,41.4 | 21.46,40.77 U8.4 | J2.4 39.37,14.1 32.64,20.83 v32.64,41.78 v32.64,58.42 31.62,59.44 v31.62,66.04
  Bottom 0.152: v10.54,79.12 11.05,79.63 18.03,79.63 v31.62,66.04 | 22.23,62.23 v21.97,62.23
  Bottom 0.254: v32.64,41.78 32.54,41.68 22.96,41.68 22.23,42.42 21.72,42.42 21.46,42.16 v21.46,41.4 | 22,62.23 22.23,62.23 28.83,62.23 v32.64,58.42
MOSI  (via drill 0.2)
  Top 0.152: U1.AD20 11.08,76.06 10.67,76.47 10.67,78.61 v11.18,79.12 | U12.18 12.65,60.78 14.86,62.99 21.46,62.99 v21.72,62.74
  Top 0.254: U8.3 21.98,41.27 v21.97,41.91 15.88,41.91 15.62,41.66 15.62,40.1 U9.9 | J2.5 74.3,16.64 73.03,15.37 39.12,15.37 33.15,21.34 v33.15,41.27 v33.15,58.67 32.13,59.69 v32.13,64.9
  Bottom 0.152: v11.18,79.12 17.91,79.12 v32.13,64.9
  Bottom 0.254: v33.15,41.27 22.35,41.27 21.97,41.66 v21.97,41.91 | v21.72,62.74 29.08,62.74 v33.15,58.67
N$1
  Top 0.254: U11.2 39.62,80.12 39.62,80.64 39.88,80.9 41.71,80.9 R1.1 R16.2
N$2
  Top 0.254: U1.C1 16.11,69.87 16.64,69.87 17.47,69.03 C5.1
N$3  (via drill 0.2)
  Top 0.152: U1.E24 9.55,70.4 8.76,69.61 v8.51,69.61
  Top 0.254: U1.B5 14.83,67.88 C15.1 | 14.91,65.57 L6.1
  Top 0.508: 14.91,66.94 C15.1 | 14.91,66.94 C29.1 14.91,65.57 | v14.35,66.94 14.91,66.94
  Bottom 0.508: v8.51,69.61 8.51,68.85 10.41,67.07 v14.35,66.94
N$4
  Top 0.152: U1.D23 9.71,69.78 9.42,69.78 8.51,68.86 C11.1
N$5
  Top 0.102: 10.11,71.14 U1.H23 9.93,71.01 9.32,71.01 | 9.32,71.01 | C3.1 8.94,71.01 9.32,71.01
  Top 0.508: C3.1 7.98,71.31 L1.2
N$6
  Top 0.305: 6.31,71.31 L1.1 | 6.31,71.31 C4.1 1.54,71.31 A2.S1 | 6.31,71.31
N$7
  cutout Route2: 0,67.82 6.1,67.82 6.1,72.9 0,72.9
N$8
  Top 0.152: C2.2 6.23,65.24 X1.3 6.35,65.02 | 6.35,65.02 6.39,65.03 | 6.35,65.02 7.24,65.9 7.24,67.44 8.13,68.33 8.89,68.33 9.58,69.01 U1.B24
N$9
  Top 0.152: C1.2 9.49,66.65 X1.1 8.38,66.69 8.38,67.18 10.08,68.88 U1.A23
N$10
  Top 0.254: U11.1 41.64,80.11 R1.2 42.62,79.12 43.56,79.12 44.2,79.76 44.2,82.55 42.78,83.96 R5.2 40.27,84.96 38.69,84.96 38.12,84.4 38.12,83.84 38.1,83.82 38.35,83.57 R6.2 R3.2
N$11
  Top 0.254: U11.5 38.11,81.22 R3.1 37.26,81.92 R15.2
N$12
  Top 0.203: R2.2 41.91,64.77 41.64,65.04 U3.4
N$13
  Top 0.254: U11.6 36.73,80.11 35.51,81.33 R15.1 R17.2
N$14
  Top 0.254: R4.1 40.51,63.26 U3.6
N$15
  Top 0.254: U8.10 U8.9 22.48,37.72 21.47,36.71 20.34,36.71 C17.1 19.98,36.78 C9.1 15.93,33.78 8.28,33.78 4.65,37.41 JP11.1 2.7,35.46 JP1.1
N$16
  Top 0.254: U11.3 39.11,80.89 39.88,81.66 40.39,81.66 40.64,81.92 | 40.64,81.92 41.27,82.55 R5.1 | R18.2 42.47,81.92 40.64,81.92
N$17
  Top 0.254: U11.4 38.61,81.73 R6.1 39.2,81.99 R19.2
N$18
  Top 0.254: U11.21 R20.2
N$19  (via drill 0.2)
  Top 0.254: Q9.B1 Q9.B2 | Q9.B2 Q9.A2 Q9.A3 | Q9.A3 Q9.B3 Q9.B2 | Q9.A3 20.31,8.19 R12.2 20.95,8.26 v21.21,8 21.34,7.87 21.34,7.37 | JP4.1 2.7,10.06 JP15.1 17.27,11.94 v19.3,9.91 | 21.34,7.37 C18.1 | Q9.A3 21.33,7.36 21.34,7.37
  Bottom 0.254: v19.3,9.91 v21.21,8
N$20
  Top 0.203: Q8.C3 10.92,15.75 10.16,15.75 10.03,15.88 10.03,16.33 U7.1
  Top 0.254: Q8.C3 Q8.C2 Q8.C1
N$21
  Top 0.254: Q9.C3 Q9.C2 Q9.C1 19.31,3.29 U10.1
N$22
  Top 0.254: Q10.C1 Q10.C2 Q10.C3 13.71,6.1 14.48,5.33 14.48,2.67 13.72,1.91 U5.5
N$23
  Top 0.254: Q11.C3 Q11.C2 Q11.C1 13.67,23.38 U2.VCC
N$24
  Top 0.254: 21.88,25.62 21.34,25.07 21.34,24.13 21.59,23.88 Q11.B1 Q11.B2 | 21.88,25.62 R14.2 | Q11.B2 Q11.B3 Q11.A3 Q11.A2 Q11.B2 | JP8.1 2.7,30.38 JP14.1 15.24,32.26 21.88,25.62
N$25
  Top 0.254: U9.14 13.09,38.98 12.7,39.37 12.7,40.97 C22.1
N$26
  Top 0.254: U9.16 12.43,37.98 11.54,37.1 | 11.54,37.1 X3.1 | C23.1 11.61,37.03 11.54,37.1
N$27
  Top 0.254: U9.15 12.42,38.48 X3.2 11.61,39.65 C24.1
N$28  (via drill 0.2)
  other vias: 7.49,46.74
N$29  (via drill 0.2)
  other vias: 19.81,47.62
N$30
  Top 0.305: U11.8 36.35,78.86 C26.1
N$31
  Top 0.254: U6.1 Q7.C3 Q7.C2 Q7.C1
N$32
  Top 0.254: R21.2 32.82,79.94 R22.1
  Top 0.305: U11.9 33.46,78.36 R22.1
N$33
  Top 0.254: Q7.A3 20.07,13.28 R10.2 | Q7.A3 Q7.A2 Q7.B2 | Q7.B2 Q7.B1 21.77,14.99 R23.2 | Q7.B2 Q7.B3 Q7.A3 | Q7.A3 20.01,14.55 C10.1 C20.1 15.93,12.45 9.78,12.45 5.84,16.38 5.84,20.83 JP12.1 2.7,20.22 JP2.1
N$34  (via drill 0.2)
  Top 0.203: Q1.6 18.49,8.26 v18.67,8.26 | v22.61,6.48 22.61,1.81 U10.3
  Bottom 0.203: v18.67,8.26 20.07,8.26 21.84,6.48 v22.61,6.48
N$35
  cutout Route15: 0,67.82 6.1,67.82 6.1,72.9 0,72.9
N$36  (via drill 0.2)
  Top 0.254: Q10.A3 Q10.B3 Q10.B2 | Q10.B2 Q10.A2 Q10.A3 | Q10.B2 Q10.B1 | Q10.A3 12.44,8.06 R13.2 v13.08,8.13 | JP5.1 2.7,15.14 JP16.1 | Q10.A3 12.45,7.11 C19.1
  Bottom 0.254: JP16.1 13.08,8.51 v13.08,8.13
N$37
  Top 0.203: Q8.B1 13.46,14.73 13.84,14.35 14.43,14.35 R24.2
  Top 0.254: Q8.A3 10.48,14.23 C21.1 | Q8.A3 11.44,13.28 R11.2 | Q8.A3 Q8.A2 Q8.B2 | Q8.B2 Q8.B1 | Q8.B2 Q8.B3 Q8.A3 | JP3.1 2.7,25.3 JP13.1 6.35,25.4 6.35,17.27 9.32,14.3 C21.1 | C21.1 10.21,14.3
N$38
  cutout Top: 0,72.9 6.1,72.9 6.1,71.63 10.29,71.63 10.29,70.61 9.91,70.63 9.14,70.61 9.01,70.52 9.01,70.15 6.1,70.1 6.1,67.82 2.29,67.82 2.29,68.83 0.76,68.83 0.76,67.82 0,67.82
  cutout Top: 0,57.53 6.1,57.53 6.1,56.77 9.91,56.77 9.91,55.24 6.1,55.24 6.1,52.45 2.29,52.45 2.29,53.47 0.76,53.47 0.76,52.45 0,52.45
  cutout Bottom: 0,57.53 6.1,57.53 6.1,56.77 9.91,56.77 9.91,55.24 6.1,55.24 6.1,52.45 2.29,52.45 2.29,53.47 0.76,53.47 0.76,52.45 0,52.45
  cutout Route2: 0,57.53 6.1,57.53 6.1,56.77 9.91,56.77 9.91,55.24 6.1,55.24 6.1,52.45 2.29,52.45 2.29,53.47 0.76,53.47 0.76,52.45 0,52.45
  cutout Route15: 0,57.53 6.1,57.53 6.1,56.77 9.91,56.77 9.91,55.24 6.1,55.24 6.1,52.45 2.29,52.45 2.29,53.47 0.76,53.47 0.76,52.45 0,52.45
N$39
  cutout Bottom: 0,67.82 6.1,67.82 6.1,72.9 0,72.9
N$41
  Top 0.203: Q1.3 17.1,3.5 U10.2
N$42
  Top 0.254: JP6.1 2.7,40.54 JP10.1 5.71,43.56 12.32,43.56 12.57,43.31 12.57,42.16 12.88,41.86 C25.1 13.34,39.61 U9.13
N$43
  cutout Top: 8.13,0 8.13,5.08 24.64,5.08 24.64,0
  cutout Bottom: 8.13,0 8.13,5.08 24.64,5.08 24.64,0
  cutout Route2: 8.13,0 8.13,5.08 24.64,5.08 24.64,0
  cutout Route15: 8.13,0 8.13,5.08 24.64,5.08 24.64,0
N$44
  Top 0.254: U1.B3 15.33,68.27 L7.2
N$45
  Top 0.254: 37.59,76.08 U11.13
  Top 0.305: U11.13 36.7,75.2 37.34,75.82
  Top 0.813: 36.7,75.2 34.86,75.2 L2.P$1
N$47
  Top 0.254: U11.14 38.11,74.83 C27.1
  Top 0.305: U11.15 U11.14
N$48
  Top 0.152: Q2.3 8.97,4.67 U5.1
N$49
  Top 0.254: 15.93,66.22 L7.1
  Top 0.508: L6.2 15.93,66.22
N$50  (via drill 0.2)
  Top 0.203: v12.45,4.57 13.64,3.38 U5.6 | Q2.6 10.11,7.75 v10.54,7.75
  Bottom 0.203: v10.54,7.75 10.72,7.57 10.73,7.57 12.45,5.85 v12.45,4.57
N$51  (via drill 0.2)
  Top 0.152: Q3.3 15.34,17.81
  Top 0.203: U7.6 10.02,18.65 10.54,19.18 v14.48,19.18 | v15.75,17.91 15.44,17.91 15.34,17.81 Q3.3
  Bottom 0.203: v14.48,19.18 v15.75,17.91
N$52
  Top 0.152: Q3.6
  Top 0.203: Q3.6 14.02,16.64 13.59,16.64 13.21,17.02 13.21,18.16 12.57,18.8 10.92,18.8 10.67,18.54 U7.5
N$54
  Top 0.152: Q4.3 19.18,17.39 20.83,17.39 21.07,17.64 U6.4
N$55
  Top 0.152: Q4.6 18.24,18.08 17.91,18.41 17.91,18.92 18.16,19.18 19.3,19.18 20.07,18.41 U6.6
N$60
  Top 0.203: B2.ANT1 8.54,56.21 U12.31
N$61
  Top 0.203: B2.ANT2 8.54,55.81 U12.32
N$62
  Top 0.152: C51.1 6.6,56 6.6,56.01
  Top 0.203: 7.07,56.01 6.6,56.01
  Top 0.254: B2.SE 7.07,56.01
  Top 0.305: A1.S1 1.6,56.01 6.6,56.01
N$63
  Top 0.203: L8.2 18.07,56.69 L9.1
N$64
  Top 0.203: U12.37 10.25,53.05 10.03,52.83 8.51,52.83 8.13,52.45 8.13,51.74 X5.1 8.12,51.74 C46.1
N$65
  Top 0.203: X5.3 9.79,50.75 C47.1 10.65,50.91 10.41,51.14 10.41,52.7 10.65,52.94 U12.38
N$66
  Top 0.152: U12.39 11.05,52.32 10.79,52.07 10.79,51.31 11.3,50.8 C48.1
N$67
  Top 0.152: U12.29 8.91,57.01 8,57.91 7.42,57.91 C49.1
NRF_A2
  Top 0.152: U12.46 13.85,52.83 14.35,52.32 15.62,52.32 16,51.94 16,51.16 X6.B 16.74,51.13 C53.1
  Top 0.203: 15.94,51.23 X6.B
NRF_A3
  Top 0.152: 14.87,51.18 X6.A | 14.87,51.18 14.87,51.81 14.67,52.01 14.16,52.01 13.45,52.72 U12.45 | C52.1 14.79,51.11 14.87,51.18
PIR_OUT  (via drill 0.2)
  Top 0.152: U1.Y23 10.08,74.75 v10.22,74.9
  Top 0.203: U12.3 16.02,55.01 v16.26,55.24
  Top 0.254: v27.56,32.64 v27.56,47.75 v27.56,74.42
  Route2 0.152: v10.22,74.9 10.76,75.44 26.54,75.44 v27.56,74.42
  Bottom 0.152: v16.26,55.24 16.51,54.99 19.07,54.99 19.51,55.42 19.86,55.42 20.11,55.18 20.13,55.18 v27.56,47.75
  Bottom 0.254: J2.14 66.55,32.64 v27.56,32.64 19.79,24.87 U2.OUT
RTC_CS  (via drill 0.2)
  Top 0.152: U1.AD10 13.59,75.41 13.59,76.33 15.37,78.11 17.91,78.11 19.3,76.71 v19.3,74.55 | U12.41 11.85,51.4 12.32,50.93 12.32,48.9 v15.62,45.59
  Top 0.254: v23.5,70.36 v23.5,50.55 23.5,46.74 20.83,44.07 16,44.07 v15.62,43.69 14.11,42.18 U9.12
  Route2 0.254: J3.2 54.74,36.96 41.4,50.29 30.73,50.29 29.34,51.69 24.64,51.69 v23.5,50.55
  Bottom 0.152: v19.3,74.55 v23.5,70.36
  Bottom 0.254: v15.62,45.59 v15.62,43.69
SCK  (via drill 0.2)
  Top 0.152: U1.AD18 11.58,76.07 11.05,76.6 11.05,78.13 v11.54,78.63 | U12.19 12.25,60.89 14.73,63.37 21.84,63.37 v21.97,63.25
  Top 0.254: v33.66,58.93 v33.66,40.77 33.66,21.97 38.99,16.64 J2.6 | U8.1 23.74,40.76 v23.75,40.77 | v17.02,38.99 U9.7
  Bottom 0.152: v11.54,78.63 11.72,78.63 11.76,78.66 17.86,78.66 31.11,65.41 31.11,61.47 31.24,61.34
  Bottom 0.254: v33.66,40.77 v23.75,40.77 18.8,40.77 v17.02,38.99 | 29.34,63.25 v21.97,63.25 | 29.34,63.25 29.84,63.25 | v33.66,58.93 31.24,61.34 29.34,63.25
SCL  (via drill 0.2)
  Top 0.152: 26.42,4.88 26.39,4.85 R7.1 | U12.16 13.45,60.56 15.11,62.23 20.7,62.23 21.21,61.72 v21.72,61.72 | U1.N1 16.27,72.4 17.53,73.66 18.54,73.66 21.72,70.48 21.72,64.26 v21.21,63.88 | v17.02,17.27 18.27,17.27 Q4.1
  Top 0.203: Q1.1 16.82,8 16.26,8 16,7.75 v16,6.48 v16,5.33 | v10.54,8.51 9.27,8.51 8.89,8.13 8.89,7.54 Q2.1 | Q3.1 15.11,16.88 v15.11,16.26
  Top 0.254: v32.13,58.17 v32.13,20.32 40.89,11.56 J2.2 | v23.88,5.33 25.91,5.33 26.39,4.85
  Route2 0.152: v21.21,63.88 21.21,62.23 v21.72,61.72
  Bottom 0.203: v16,6.48 12.83,6.48 10.79,8.51 v10.54,8.51
  Bottom 0.254: v16,5.33 v23.88,5.33 27.94,5.33 32.13,10.03 v32.13,20.32 16.76,20.32 16.74,20.3 16.69,20.3 16.26,19.86 16.26,16.89 | v21.72,61.72 28.57,61.72 v32.13,58.17 | v15.11,16.26 15.62,16.26 16.26,16.89 | 16.26,16.89 16.64,17.27 v17.02,17.27
SDA  (via drill 0.2)
  Top 0.152: 29.34,4.9 R8.1 | U1.L1 16.28,71.9 17.65,73.28 18.41,73.28 21.34,70.36 21.34,64.64 v21.21,64.64 | U12.14 14.25,60.35 15.11,61.21 v21.97,61.21 | Q4.4 19.02,18.64 v19.05,18.67 | Q3.4 14.31,17.99 16.13,19.81 v19.3,19.81
  Top 0.203: Q2.4 11.25,5.33 v13.08,5.33
  Top 0.254: v31.62,57.91 v31.62,19.81 41.15,10.29 73.66,10.29 J2.1 | Q1.4 18.67,6.3 v18.67,5.84 | v27.43,5.84 28.32,5.84 29.26,4.9 29.34,4.9
  Route2 0.152: v21.21,64.64 21.84,64.64 22.48,64.01 22.48,61.72 v21.97,61.21
  Bottom 0.152: v19.05,18.67 19.05,19.56 v19.3,19.81
  Bottom 0.254: v21.97,61.21 28.32,61.21 v31.62,57.91 | v13.08,5.33 13.23,5.49 13.23,5.53 13.54,5.84 v18.67,5.84 v27.43,5.84 27.81,5.84 31.62,10.16 v31.62,19.81 v19.3,19.81
SW  (via drill 0.2, 0.76)
  Top 0.152: U12.8 16.24,57.01 v16.38,57.15 | U1.G1 16.2,71.02 16.34,71.02 17.52,72.21 v18.16,72.21
  Top 0.254: 45.85,64.9 v47.37,64.9
  Top 0.813: v47.37,64.9 52.07,64.9 J3.8
  Route15 0.254: v18.16,72.21 24.84,72.21 26.29,73.66 v34.67,73.66 | v16.38,57.15 17.53,58.29 21.08,58.29 25.91,63.12 v34.67,63.12
  Bottom 0.254: v47.37,64.9 45.85,64.9 37.08,73.66 v34.67,73.66 v34.67,63.12
  pour Top (isolate 0.203, no thermals): 42.55,64.24 46.35,64.24 46.35,72.01 43.81,72.01 43.81,64.64 42.55,64.64
SWDCLK  (via drill 0.2)
  Top 0.102: J1.4 23.75,83.08 24.66,82.17 24.66,80.89 23.64,79.88 22.48,79.88 v21.08,81.28 | U1.AA24 9.54,74.44 8.26,75.72 8.26,78.02 12.53,82.3 v20.07,82.3
  Top 0.152: U12.24 10.25,60.54 R29.1 9.51,61.21 v8.76,61.21 | v8.95,74.36 9.46,74.36 9.54,74.44
  Route15 0.152: v8.95,74.36 9.02,74.42 11.18,74.42 11.68,73.91 11.68,65.41 8.76,62.48 v8.76,61.21
  Bottom 0.102: v21.08,81.28 v20.07,82.3
SWDIO  (via drill 0.2)
  Top 0.102: J1.6 22.07,83.03 22.07,82.7 v21.38,82 21.16,81.79 12.38,81.79 8.51,77.92 8.51,76.07 | J1.2 24.89,83.31 v24.89,82.68 | U1.AC24 8.51,75.97 8.51,76.07 | v9.02,76.07 8.51,76.07
  Top 0.152: U12.23 10.65,61.29 R26.2 10.21,62.66 v10.41,62.87 | 8.53,76.07 v9.02,76.07
  Route15 0.152: v10.41,62.87 12.01,64.47 12.01,66.47 12.83,67.29 12.83,74.17 10.92,76.07 v9.02,76.07
  Bottom 0.102: v24.89,82.68 24.15,82.68 23.75,83.08 22.45,83.08 v21.38,82
VBAT  (via drill 0.2, 0.76)
  Top 0.152: U1.J1 16.28,71.4 17.65,72.77 v18.16,72.77 | U12.6 16.82,56.21 v16.89,56.13
  Top 0.254: JP6.2 4.41,39.72 4.51,39.81 | 4.51,39.81 JP10.2 | R27.2 65.48,53.14 v60.58,58.04 | R28.2 9.53,34.8 4.51,39.81
  Top 0.305: U11.18 40.86,76.11 v41.78,75.18
  Route15 0.254: v18.16,72.77 24.77,72.77 26.92,74.93 41.53,74.93 v41.78,75.18 | v16.89,56.13 17.04,56.29 17.09,56.29 18.21,57.4 v29.08,57.4
  Route15 0.508: JP10.2 10.54,33.91 51.5,33.91 BT4.+
  Bottom 0.254: 39.5,57.28 39.37,57.15 39.12,57.4 v29.08,57.4 | v60.58,58.04 58.67,58.04
  Bottom 0.813: v41.78,75.18 58.42,75.18 58.67,74.93 | J3.6 69.98,42.04 56.96,55.05
  Bottom 1.27: 39.5,57.28 BT3.+
  Bottom 2.54: 49.27,47.37 55.56,41.08 BT4.+ | BT3.+ 49.27,47.37 | BT2.+ 58.67,74.93 58.67,58.04 58.67,56.77 56.96,55.05 49.27,47.37
VCC  (via drill 0.2, 0.76)
  Top 0.102: J1.1 25.7,84.71 25.93,84.94 27.28,84.94 v27.3,84.96
  Top 0.152: JP7.2 1.52,44.52 | 27.3,4.76 R7.2 | 28.33,4.76 R8.2
  Top 0.203: 28.33,4.76 28.26,4.83 R7.2 27.69,4.37 v27.69,4.06
  Top 0.254: JP4.2 1.68,9.4 JP15.2 | JP5.2 4.41,14.32 JP16.2 | JP8.2 4.41,29.56 JP14.2 | JP2.2 4.41,19.4 JP12.2 | JP3.2 4.41,24.48 JP13.2 | JP1.2 4.41,34.64 JP11.2
  Top 1.27: JP9.2 2.92,44.96 2.48,44.52 1.52,44.52
  other vias: 47.88,62.74 46.35,62.74
  pour Top (isolate 0.203, no thermals): 42.55,62.87 42.55,63.75 48.9,63.75 48.9,61.85 43.05,61.85 43.05,62.87
  pour Route15 (rank 2): 0,89.41 79.25,89.41 79.25,0 0,0
VCC_JUMP  (via drill 0.2)
  Top 0.152: C8.1 9.7,76.37 | 1.52,45.94 JP7.1
  Top 0.203: C12.1 10.58,67.47 v10.58,67.96 v10.57,67.96 10.57,68.89 U1.A22 | v11.96,76.85 12.4,76.42 C7.1 U1.AD14 | v9.02,76.85 9.45,76.42 C8.1 9.65,75.83 U1.AD23 | 15.55,58.61 U12.12 15.58,58.61 15.96,58.99 C42.1 | U12.1 15.9,54.21 v16.26,53.85 16.57,54.17 C44.1 16.9,54.21 | 16.02,74.07 v16.89,74.95 | 16.02,74.07 15.91,74.07 15.83,74.15 U1.Y2 | U1.W1 16.02,73.96 16.02,74.07
  Top 0.254: C14.1 16.89,68.09 16.76,68.22 | 16.76,68.22 16.08,68.9 U1.B1 | 16.76,68.22 v16.76,68.98 | C42.1 16.43,59.23 v16.76,59.56
  Top 0.508: C6.1 17.14,75.18 v16.89,74.95
  Top 1.27: JP9.1 3.45,46.38 2.33,46.38 1.9,45.94 1.52,45.94
  Route2 0.813: v16.76,59.56 v16.76,68.98
  Route15 0.813: JP9.1 9.65,52.58 10.92,52.58 12.19,53.85 v16.26,53.85
  Bottom 0.203: v16.26,53.85 15.11,54.99 15.11,57.91 v16.76,59.56
  Bottom 0.508: v9.02,76.85 v11.96,76.85 14.99,76.85 v16.89,74.95 17.14,74.69 17.14,69.36 v16.76,68.98 15.75,67.96 v10.57,67.96
VDD_PA1
  Top 0.203: U12.30 8.8,56.61 8.36,57.05 C50.1 7.92,57.02 B2.VCC
VSEC  (via drill 0.2, 0.76)
  Top 0.152: U12.5 16.58,55.81 v16.89,55.5 | U1.A12 13.08,68.7 12.45,68.07 v12.45,66.29
  Top 0.254: U11.17 39.61,75.7 v41.78,73.53
  Top 0.813: v41.78,73.53 69.64,73.53 BT1.+
  Route15 0.254: v16.89,55.5 32.38,55.5 35.18,57.78 35.18,70.48 | 35.18,70.48 30.99,66.29 v12.45,66.29 | 35.18,70.48 38.23,73.53 v41.78,73.53
  Bottom 0.813: J3.5 76.58,43.69 76.58,64.14 72.52,68.2 72.52,73.95 BT1.+
VSOL  (via drill 0.2)
  Top 0.152: U12.7 16.73,56.61 v16.89,56.77 | U1.A10 13.46,68.78 13.46,68.65 12.95,68.15 12.95,66.17 v12.45,65.66 | C28.1 30.88,78.88 30.86,78.87
  Top 0.305: v30.86,77.72 34.29,77.72 34.42,77.86 U11.10
  Top 0.813: 30.86,78.87 30.86,81.28 35.31,85.72 42.16,85.72 49.91,77.98 70.87,77.98 73.79,75.06 73.79,69.55 D1.+ 77.72,59.61 77.72,47.37 J3.7 | 30.86,78.87 v30.86,77.72 30.86,75.49 L2.P$2 | R22.2 30.99,78.99 30.86,78.87
  Route15 0.254: v16.89,56.77 17.93,57.81 28.09,57.81 v32.77,62.48 | v32.77,63.63 31.5,63.63 29.46,65.66 v12.45,65.66
  Bottom 0.254: v30.86,77.72 32.77,75.82 v32.77,63.63 v32.77,62.48
VSW
  Top 0.254: C13.1 40.16,60.56 R4.2 | U11.16 39.11,75.19 39.12,75.18
  Top 0.813: L3.P$1 39.12,70.23 39.12,75.18 | TP10.TESTPOINT 38.35,64.9
  pour Top (isolate 0.203, no thermals): 41.27,64.14 40.01,64.14 40.01,61.85 37.72,61.85 37.72,72.01 40.01,72.01 40.01,64.64 41.27,64.64
WDI  (via drill 0.2)
  Top 0.152: v11.3,51.69 11.45,51.83 U12.40 | U1.A8 14.08,68.69 13.34,67.94 13.34,65.28 14.1,64.52 20.07,64.52 v20.57,65.02
  Top 0.254: U9.2 14.61,36.33 v14.1,35.81 | v11.43,44.58 20.7,44.58 22.99,46.86 v22.99,51.05 v22.99,63.75
  Route2 0.254: v22.99,51.05 24.51,52.58 39.75,52.58 54.86,37.47 70.99,37.47 71.75,38.23 73.66,38.23 J3.3
  Bottom 0.152: v22.99,63.75 21.46,65.02 21.21,65.28 20.83,65.28 v20.57,65.02
  Bottom 0.254: v14.1,35.81 13.97,35.81 11.43,38.35 v11.43,44.58 11.43,51.56 v11.3,51.69
XL1
  Top 0.102: U1.D2 15.7,70.15 15.8,70.25 16.76,70.25 17.27,69.74 17.95,69.74 X2.A
  Top 0.203: C31.2 18.89,70.68 X2.A
XL2
  Top 0.102: U1.F2 15.7,70.65 15.8,70.55 17.56,70.55 X2.B
  Top 0.203: X2.B 17.73,70.62 C30.2

## Text on the board
tPlace: RTC | Accel | Occupancy | Light | Color | Humidity | Pressure
tNames: AA | Permamote Eval / Neal Jackson / 10/17 | NRF52840 | VSW | NRF51822 | RESET | Current / Measure | MCU | GND | SW | VSOL | RTC | VBAT | VSEC | !RST | WDI | Accel | RTC_CS | !RTC_I3 | !RTC_I2 | !RTC_I1 | Occu | ACC_CS | !ACC_I2 | !ACC_I1 | !ACC_EN | Light | PIR_OUT | !PIR_EN | 2/3 AA | !LT_INT | !LT_EN | Color | !CLR_INT | !CLR_EN | !HUM_EN | !PR_EN | Hum | SCK | MOSI | MISO | !I2C_EN | Pres | SCL | SDA | CR123A